# Altium PCB PCB1.pcbdoc (part 1 of 3)
Units mil, origin at the board's own origin, x right, y up, seen from the top; angles counter-clockwise.
Board outline 3735 x 4815 mil, 4 copper layers (Top Layer, Inner1, Inner2, Bottom Layer); 129 components, 135 nets, 714 pads, 315 vias.
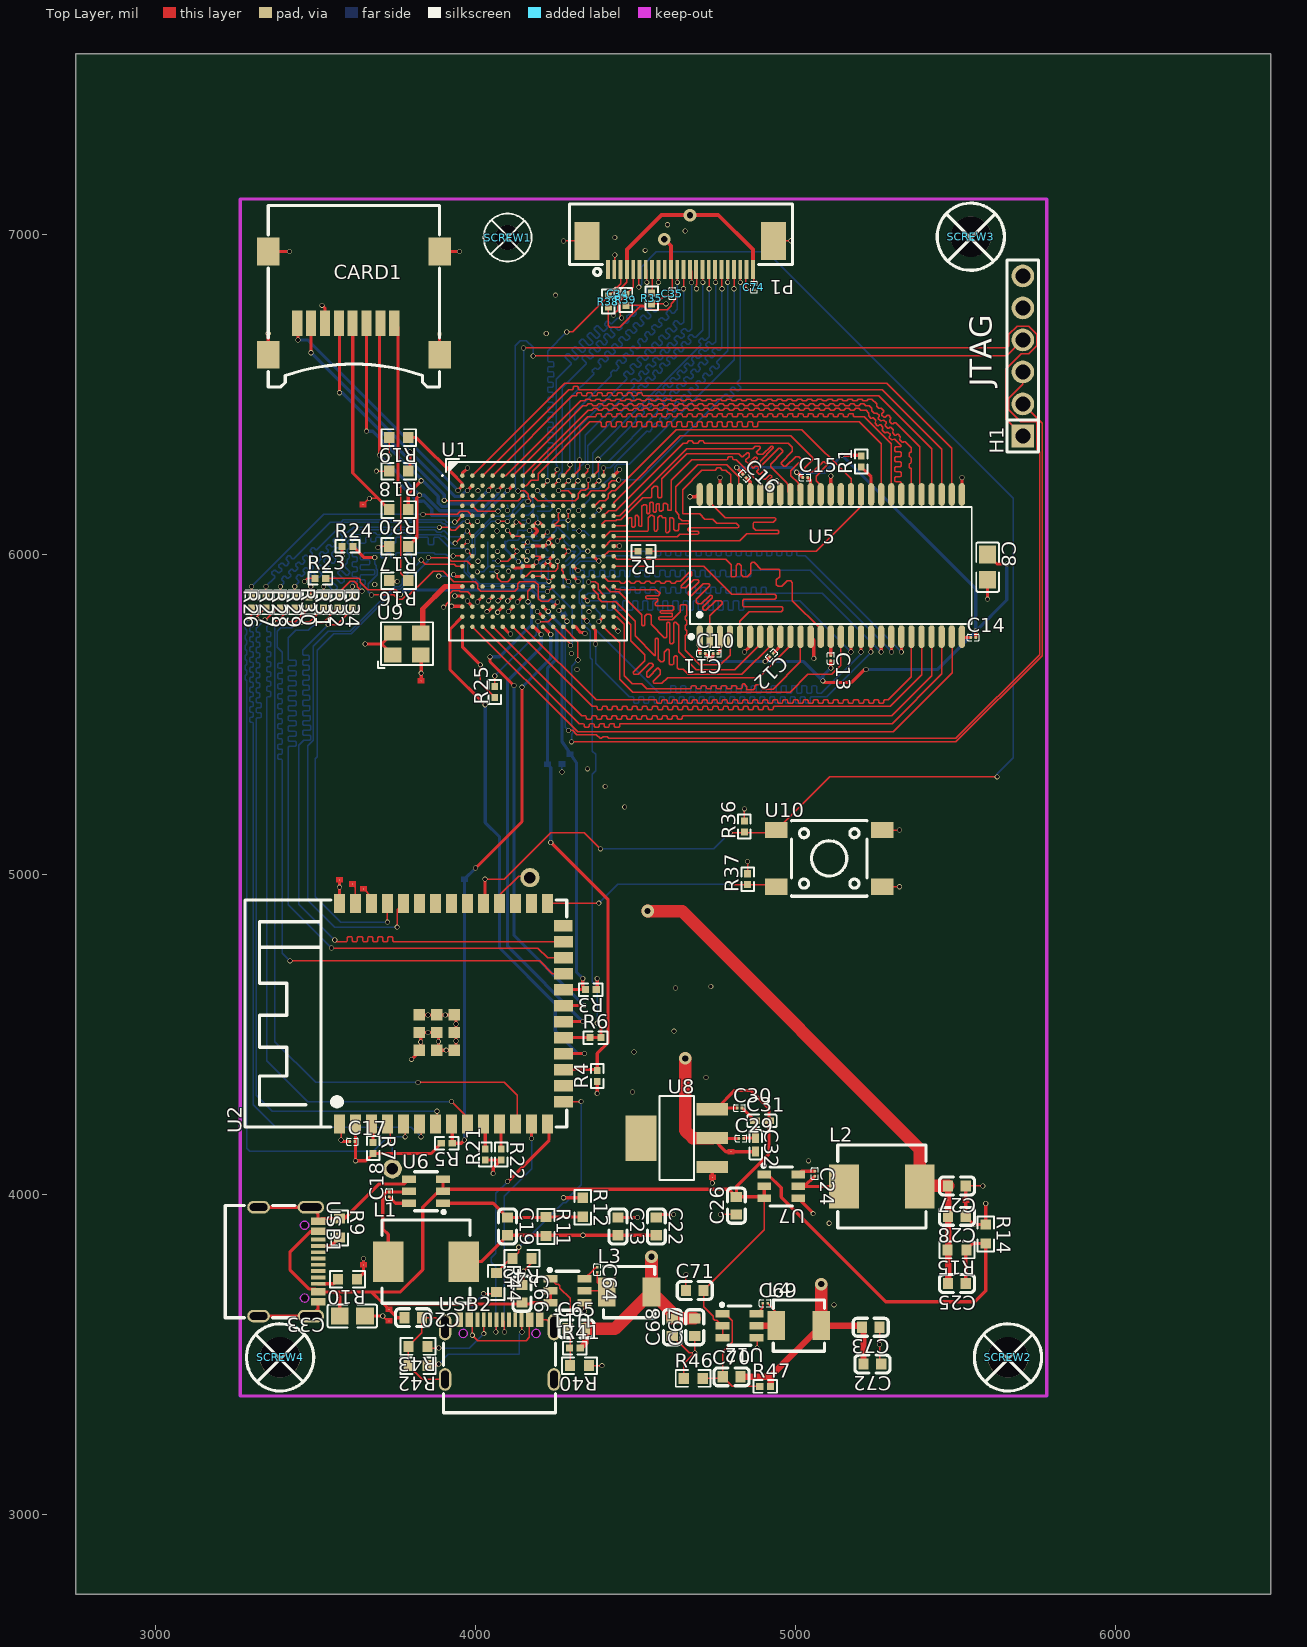
[diagram p0: Top Layer view]
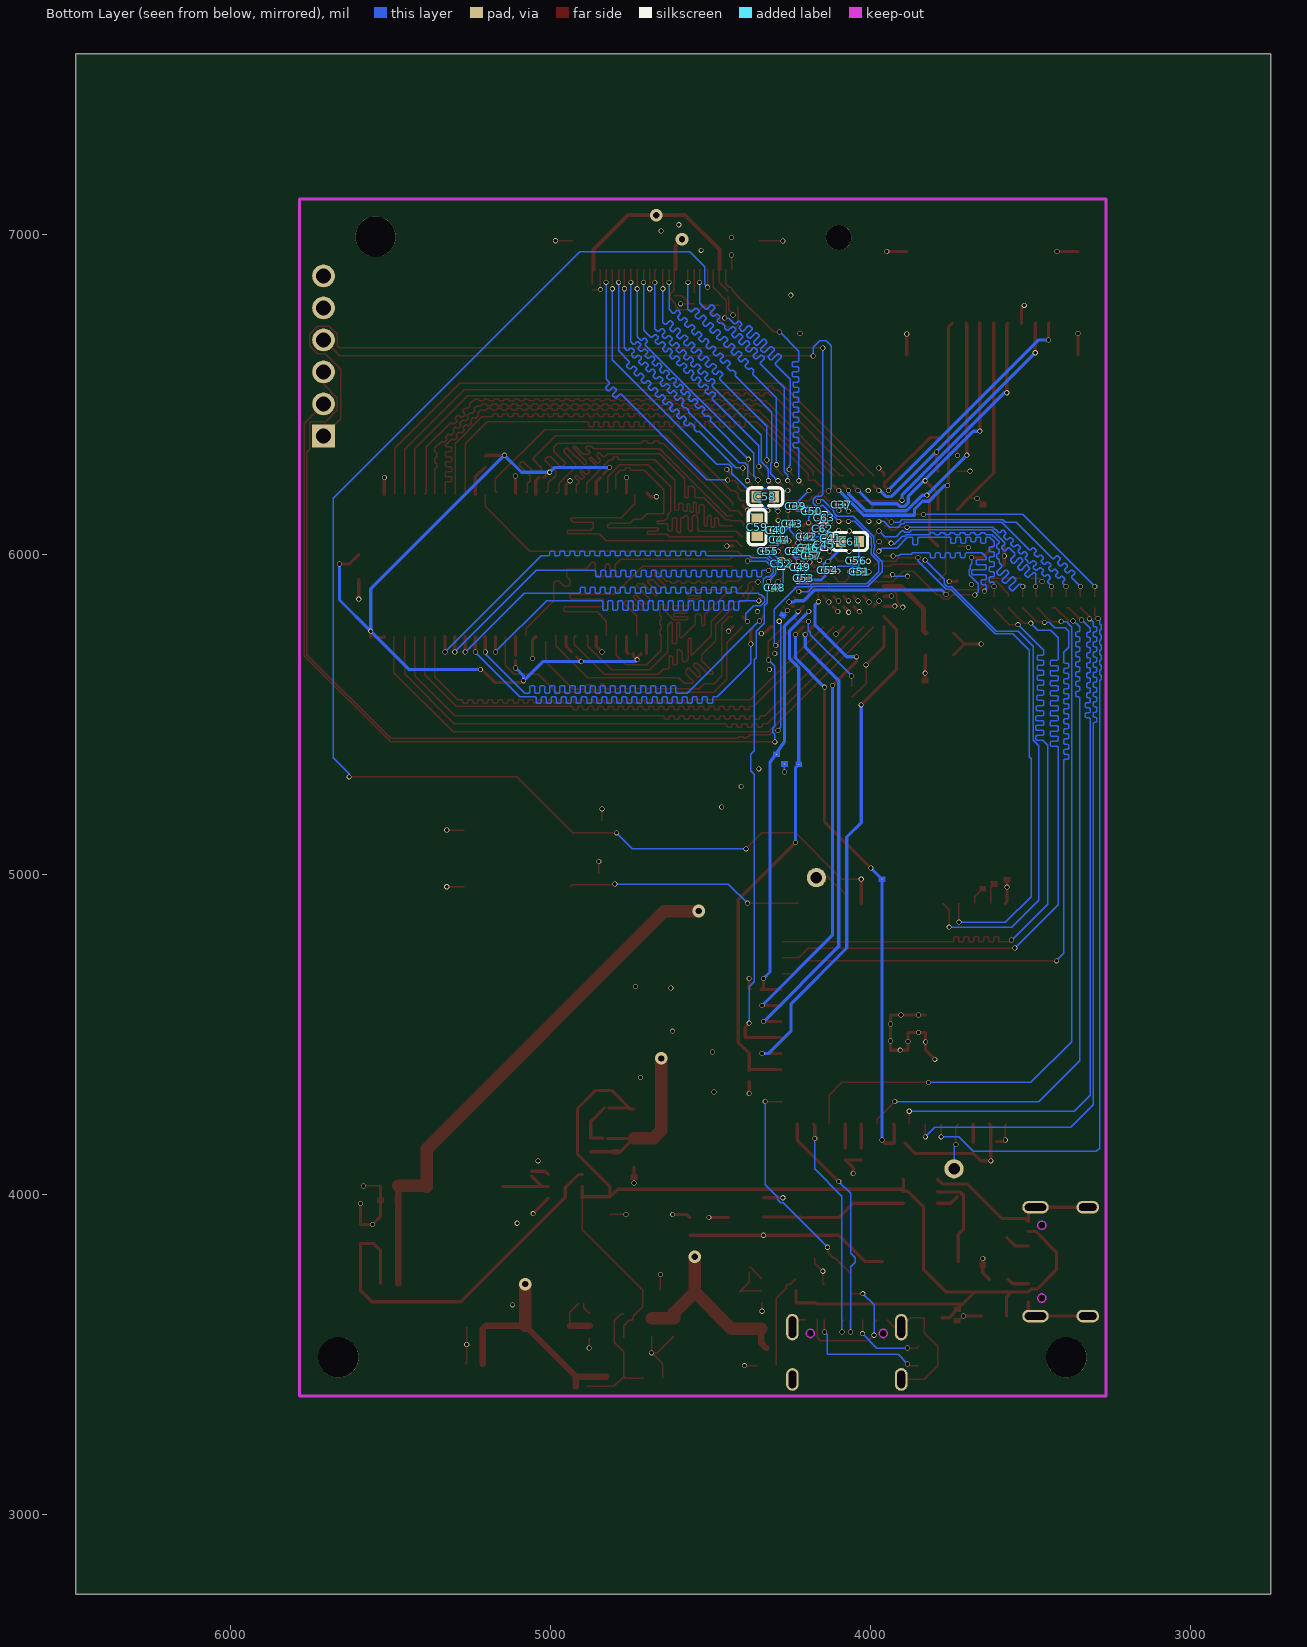
[diagram p1: Bottom Layer view, seen from below]
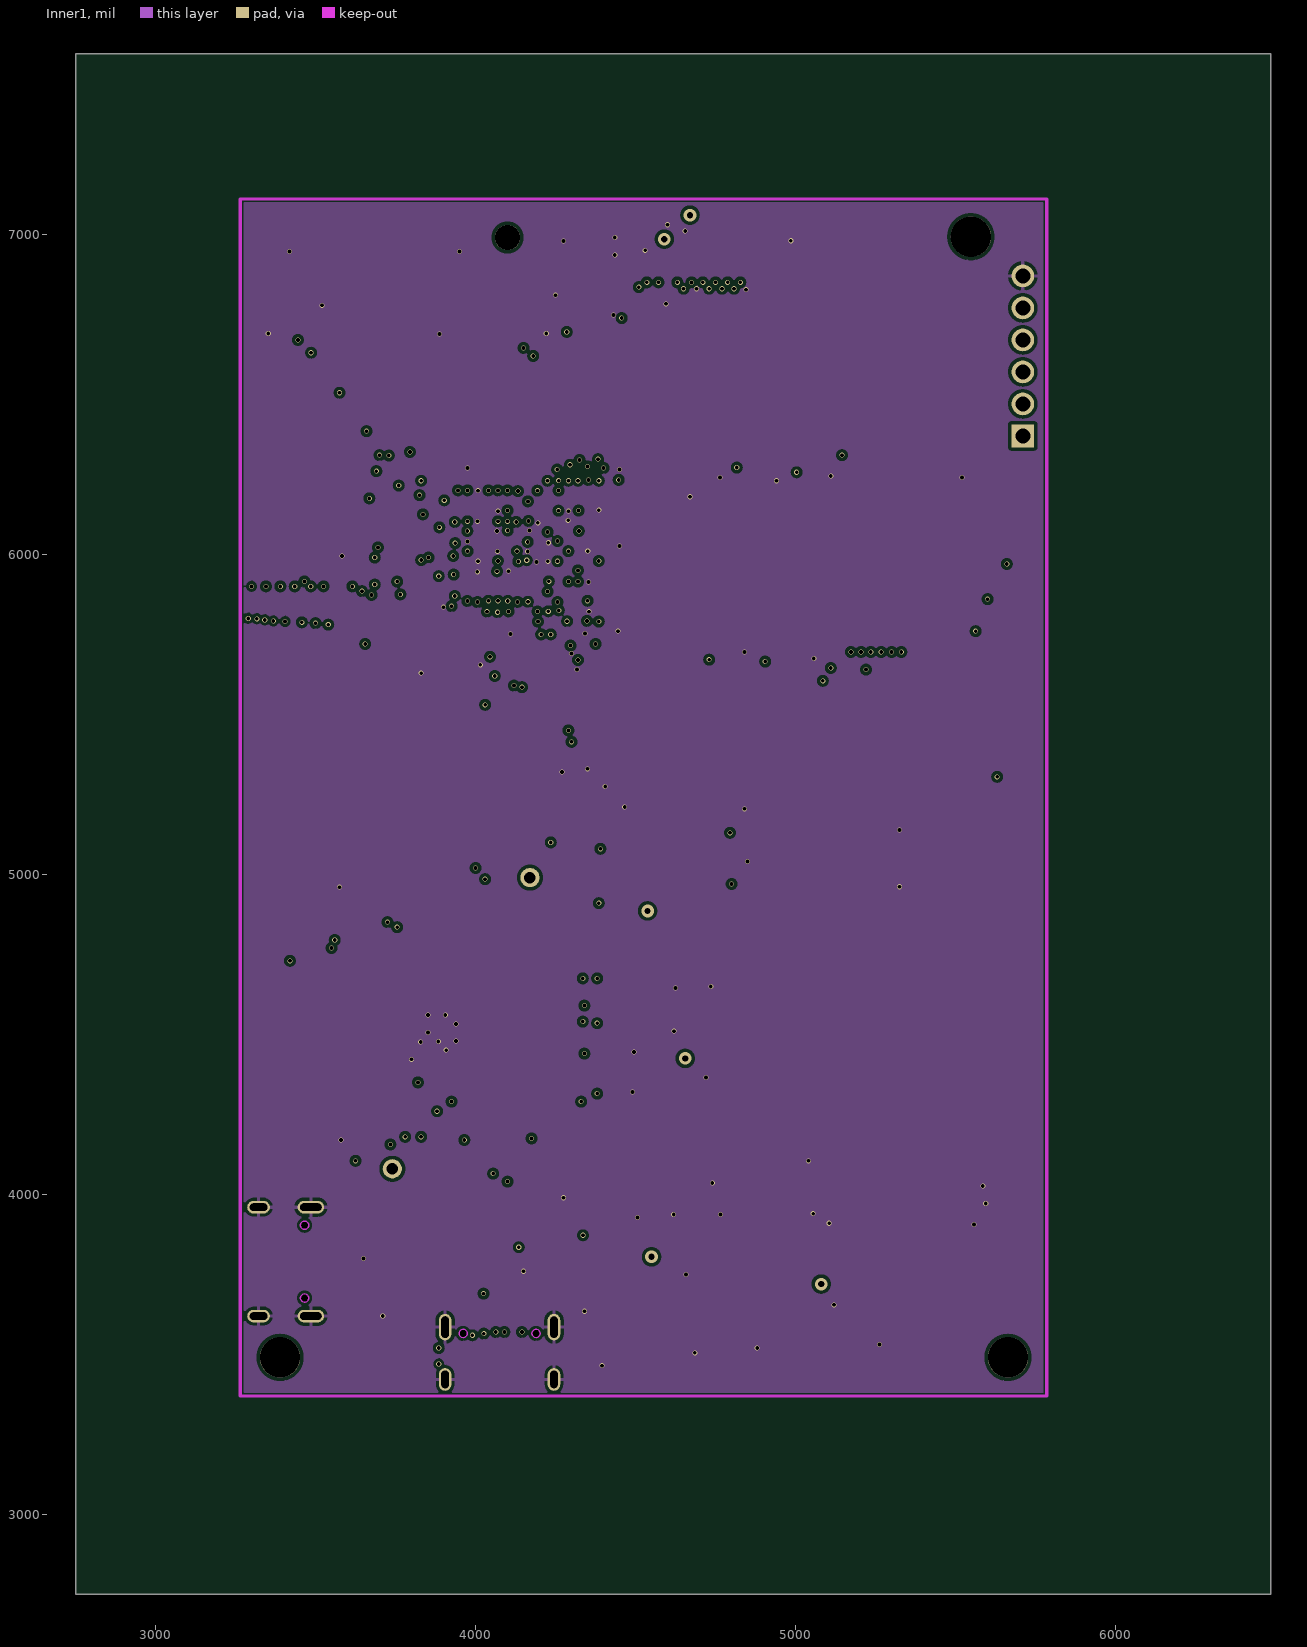
[diagram p2: Inner1]
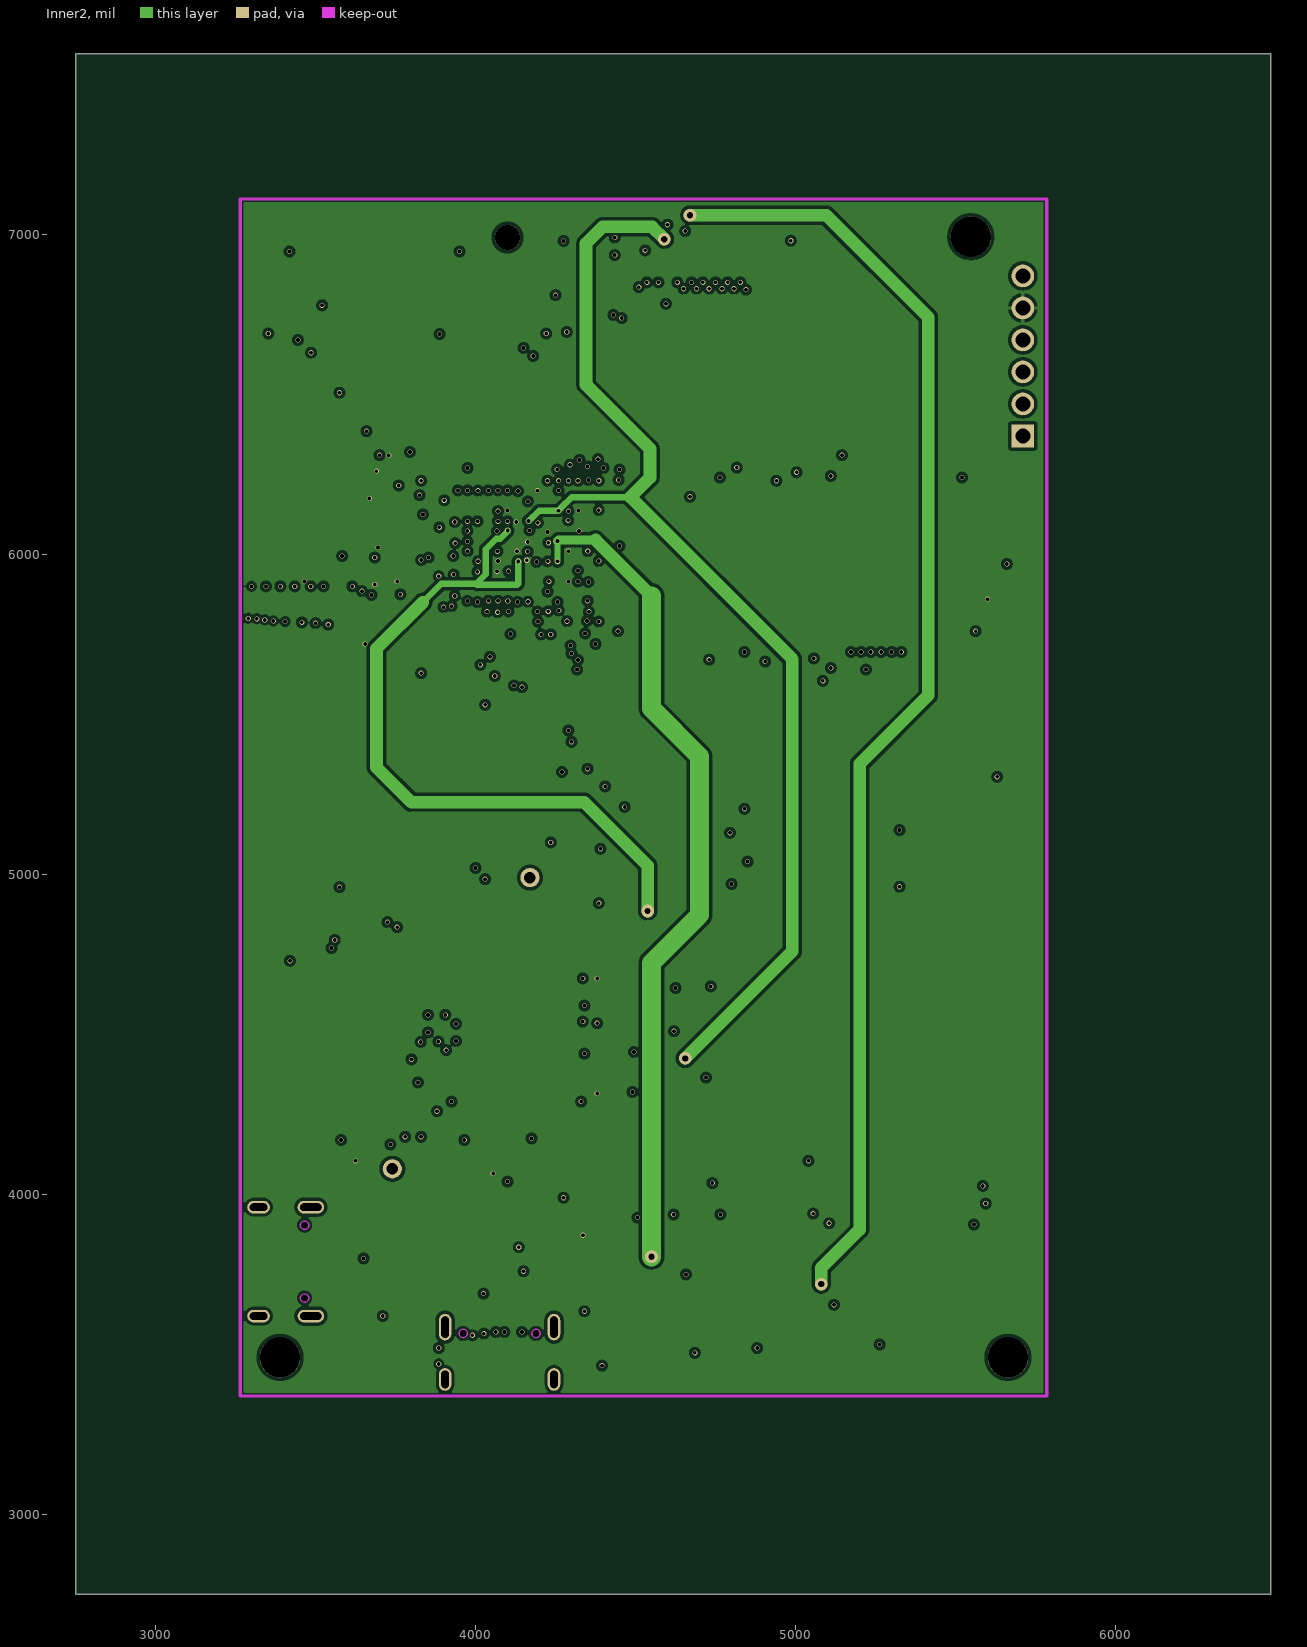
[diagram p3: Inner2]

## Layer stack, top to bottom
Top Solder Mask Layer: solder mask 0.4, Solder Resist, Dk 3.5
Top Layer: signal copper 1.4
Dielectric1: dielectric 12.6, FR-4, Dk 4.8
Inner1: signal copper 1.4
Dielectric2: dielectric 12.6, FR-4, Dk 4.8
Inner2: signal copper 1.4
Dielectric3: dielectric 12.6, FR-4, Dk 4.8
Bottom Layer: signal copper 1.4
Bottom Solder Mask Layer: solder mask 0.4, Solder Resist, Dk 3.5

## Board outline
6485,2750 2750,2750 2750,7565 6485,7565

## Design rules (kind name [scope] priority, off if disabled: settings)
BoardOutlineClearance copperThickness1oz_1 [All] p1: gap=10 ignorepadtopadclearanceinfootprint=FALSE except(0: Arc-SplitContinuation Track-SplitContinuation SMDPad-SplitContinuation THPad-SplitContinuation Via-SplitContinuation Fill-SplitContinuation Poly-SplitContinuation Region-SplitContinuation Text-SplitContinuation; 6: Track-CutoutEdge SMDPad-CutoutEdge THPad-CutoutEdge Via-CutoutEdge Region-CutoutEdge; 11.8: Track-OutlineEdge SMDPad-OutlineEdge THPad-OutlineEdge Via-OutlineEdge Fill-OutlineEdge Fill-CutoutEdge Poly-OutlineEdge Region-OutlineEdge Text-OutlineEdge)
BoardOutlineClearance copperThickness2oz_1 [All] p2: gap=10 ignorepadtopadclearanceinfootprint=FALSE except(0: Arc-SplitContinuation Track-SplitContinuation SMDPad-SplitContinuation THPad-SplitContinuation Via-SplitContinuation Fill-SplitContinuation Poly-SplitContinuation Region-SplitContinuation Text-SplitContinuation; 6: Track-CutoutEdge SMDPad-CutoutEdge THPad-CutoutEdge Via-CutoutEdge Region-CutoutEdge; 11.8: Track-OutlineEdge SMDPad-OutlineEdge THPad-OutlineEdge Via-OutlineEdge Fill-OutlineEdge Fill-CutoutEdge Poly-OutlineEdge Region-OutlineEdge Text-OutlineEdge)
Clearance copperThickness1oz [(InNet('SD_A0') OR InNet('SD_A1') OR InNet('SD_A2') OR InNet('SD_A3') OR InNet('SD_A4') OR InNet('SD_A5') OR InNet('SD_A6') OR InNet('SD_A7') OR InNet('SD_A8') OR InNet('SD_A9') OR InNet('SD_A10') OR InNet('SD_A11') OR InNet('SD_A12') OR InNet('SD_DQ15') OR InNet('SD_DQ14') OR InNet('SD_DQ8') OR InNet('SD_BA0') OR InNet('SD_BA1') OR InNet('SD_DQ9') OR InNet('SD_DQ7') OR InNet('SD_CLK') OR InNet('SD_WE_N') OR InNet('SD_DQ10') OR InNet('SD_CAS_N') OR InNet('SD_DQM1') OR InNet('SD_DQ2') OR InNet('SD_DQ3') OR InNet('SD_DQ11') OR InNet('SD_DQ12') OR InNet('SD_DQ13') OR InNet('SD_DQ0') OR InNet('SD_DQ1') OR InNet('SD_CS_N') OR InNet('SD_RAS_N') OR InNet('SD_DQ4') OR InNet('SD_DQ6') OR InNet('$1N9241') OR InNet('$1N9192') OR InNet('GND') OR InNet('$1N9142') OR InNet('SD_DQ5') OR InNet('$1N9091') OR InNet('SD_DQM0') OR InNet('$1N9039') OR InNet('$1N8986') OR InNet('$1N8318') OR InNet('$1N9437') OR InNet('$1N9341') OR InNet('+3V3') OR InNet('$1N11348') OR InNet('DOUT') OR InNet('DIN') OR InNet('CCLK') OR InNet('DONE') OR InNet('PROGRAMN') OR InNet('INITN') OR InNet('$1N11975') OR InNet('DN') OR InNet('DP') OR InNet('$1N14459') OR InNet('$1N14416') OR InNet('$1N14567') OR InNet('+5V') OR InNet('$1N16833') OR InNet('$1N16832') OR InNet('+1V1') OR InNet('$1N16834') OR InNet('+1V8') OR InNet('$1N17349') OR InNet('$1N12557') OR InNet('$1N12553') OR InNet('M_D2') OR InNet('M_D3') OR InNet('M_CMD') OR InNet('M_CLK') OR InNet('M_D0') OR InNet('M_D1') OR InNet('SDA') OR InNet('SCL') OR InNet('RESET') OR InNet('VSYNC') OR InNet('HREF') OR InNet('Y9') OR InNet('MCLK') OR InNet('Y8') OR InNet('Y7') OR InNet('PCLK') OR InNet('Y6') OR InNet('Y2') OR InNet('Y5') OR InNet('Y3') OR InNet('Y4') OR InNet('CRYSTAL') OR InNet('SSPI_CS_N') OR InNet('D0') OR InNet('D1') OR InNet('D2') OR InNet('D4') OR InNet('D3') OR InNet('D5') OR InNet('D6') OR InNet('D7') OR InNet('RX') OR InNet('TX') OR InNet('$1N29790') OR InNet('$1N29833') OR InNet('$1N29916') OR InNet('$1N29959') OR InNet('$1N30002') OR InNet('$1N30085') OR InNet('$1N30089') OR InNet('$1N30093') OR InNet('TDO') OR InNet('TDI') OR InNet('TMS') OR InNet('TCK') OR InNet('$1N33205') OR InNet('PROGRAM') OR InNet('$2N5507') OR InNet('$2N5509') OR InNet('$2N5511') OR InNet('FSDA') OR InNet('FSCL') OR InNet('+2V5') OR InNet('$1N60668') OR InNet('$1N60669') OR InNet('$1N60670') OR InNet('USB_VBUS') OR InNet('$1N63772') OR InNet('$1N63749') OR InNet('$1N63825') OR InNet('+2V8') OR InNet('$1N64402') OR InNet('$1N64401') OR InNet('$1N64403'))] p1: gap=6 ignorepadtopadclearanceinfootprint=FALSE except(3.9: Track-Track; 6.9: Track-Hole SMDPad-Hole THPad-Hole Via-Hole Fill-Hole Poly-Hole Region-Hole Text-Hole; 7: Arc-Arc Arc-Track Arc-SMDPad Arc-THPad Arc-Via Arc-Fill Arc-Poly Arc-Region Arc-Text Arc-Hole; 11.8: Track-Fill Fill-Region)
Clearance copperThickness2oz [All] p2: gap=6 ignorepadtopadclearanceinfootprint=FALSE except(6.9: Track-Hole SMDPad-Hole THPad-Hole Via-Hole Fill-Hole Poly-Hole Region-Hole Text-Hole; 7: Arc-Arc Arc-Track Arc-SMDPad Arc-THPad Arc-Via Arc-Fill Arc-Poly Arc-Region Arc-Text Arc-Hole; 8: Track-Track; 11.8: Track-Fill Fill-Region)
DiffPairsRouting differentialPair [All] p1: maxlimit=6 minlimit=6 mostfreqgap=6 toplayer_minwidth=5 toplayer_maxwidth=100 toplayer_prefwidth=10 midlayer1_minwidth=5 midlayer1_maxwidth=100 midlayer1_prefwidth=10 midlayer2_minwidth=5 midlayer2_maxwidth=100 midlayer2_prefwidth=10 bottomlayer_minwidth=5 bottomlayer_maxwidth=100 bottomlayer_prefwidth=10 maxuncoupledlength=10
PasteMaskExpansion pasteMaskExpansion [All] p1: expansion=0
PlaneConnect innerPlane [All] p1: planeconnectstyle=Relief reliefexpansion=20 reliefentries=4 reliefconductorwidth=10 reliefairgap=10
PolygonConnect copperRegion [All] p1: connectstyle=Relief reliefconductorwidth=10 reliefentries=4 polygonreliefangle="90 Angle" airgapwidth=10
RoutingVias viaSize [All] p1: holewidth=11.81 width=15.75 viastyle="Through Hole" minholewidth=11.81 minwidth=15.75 maxholewidth=248.03 maxwidth=393.7
SolderMaskExpansion solderMaskExpansion [All] p1: expansion=2 istentingtop=FALSE useseparateexpansions=TRUE expansionbottom=2 istentingbottom=FALSE
Width copperThickness1oz_2 [All] p1: maxlimit=100 minlimit=4 preferedwidth=4
Width copperThickness2oz_2 [All] p2: maxlimit=100 minlimit=8 preferedwidth=10
27 further rules are at their usual default settings.

## Components (designator, comment, footprint, x,y, rotation, side; value= is the part's Value field where it differs from the comment)
C8 "CL21A476MQYNNNE" C0805 5600,5960 r270 top
C10 "GRM022R60J104KE15D" C01005 4710,5690 r0 top
C11 "GRM022R60J104KE15D" C01005 4750,5690 r180 top
C12 "GRM022R60J104KE15D" C01005 4925,5685 r225 top
C13 "GRM022R60J104KE15D" C01005 5110,5675 r270 top
C14 "GRM022R60J104KE15D" C01005 5555,5740 r0 top
C15 "GRM022R60J104KE15D" C01005 5030,6240 r0 top
C16 "GRM022R60J104KE15D" C01005 4840,6245 r315 top
C17 "GRM022R60J104KE15D" C01005 3615,4165 r0 top
C18 "GRM022R60J104KE15D" C01005 3730,4000 r90 top
C19 "TCC0603X7R104K500CT" C0603 4100,3900 r270 top
C20 "TCC0603X5R226M6R3CT" C0603 3805,3615 r180 top
C22 "TCC0603X5R226M6R3CT" C0603 4565,3900 r270 top
C23 "TCC0603X5R226M6R3CT" C0603 4445,3900 r270 top
C24 "GRM022R60J104KE15D" C01005 5060,4065 r270 top
C25 "TCC0603X7R104K500CT" C0603 5504.18,3721.54 r180 top
C26 "TCC0603X5R226M6R3CT" C0603 4815,3965 r90 top
C27 "TCC0603X5R226M6R3CT" C0603 5504.18,4026.54 r180 top
C28 "TCC0603X5R226M6R3CT" C0603 5504.18,3931.54 r180 top
C29 "GRM022R60J104KE15D" C01005 4830,4175 r0 top
C30 "GRM022R60J104KE15D" C01005 4825,4270 r0 top
C31 "GRM155R60J106ME44D" C0402 4895,4230 r0 top
C32 "GRM155R60J106ME44D" C0402 4875,4155 r270 top
C33 "CL21A476MQYNNNE" C0805 3615,3620 r180 top
C34 "GRM022R60J104KE15D" C01005 4445,6815 r270 top
C35 "GRM022R60J104KE15D" C01005 4615,6815 r270 top
C37 "GRM022R60J104KE15D" C01005 4090,6155 r180 bottom
C39 "GRM022R60J104KE15D" C01005 4235,6150 r180 bottom
C40 "GRM022R60J104KE15D" C01005 4295,6075 r180 bottom
C41 "GRM022R60J104KE15D" C01005 4125,6050 r90 bottom
C42 "GRM022R60J104KE15D" C01005 4200,6055 r180 bottom
C43 "GRM022R60J104KE15D" C01005 4245,6095 r180 bottom
C44 "GRM022R60J104KE15D" C01005 4285,6045 r180 bottom
C45 "GRM022R60J104KE15D" C01005 4145,6030 r270 bottom
C46 "GRM022R60J104KE15D" C01005 4195,6020 r180 bottom
C47 "GRM022R60J104KE15D" C01005 4235,6010 r0 bottom
C48 "GRM022R60J104KE15D" C01005 4300,5895 r180 bottom
C49 "GRM022R60J104KE15D" C01005 4220,5960 r180 bottom
C50 "GRM022R60J104KE15D" C01005 4185,6135 r180 bottom
C51 "GRM022R60J104KE15D" C01005 4035,5945 r180 bottom
C52 "GRM022R60J104KE15D" C01005 4280,5970 r270 bottom
C53 "GRM022R60J104KE15D" C01005 4210,5925 r180 bottom
C54 "GRM022R60J104KE15D" C01005 4135,5950 r180 bottom
C55 "GRM022R60J104KE15D" C01005 4320,6010 r0 bottom
C56 "GRM022R60J104KE15D" C01005 4045,5980 r180 bottom
C57 "GRM022R60J104KE15D" C01005 4185,5995 r0 bottom
C58 "TCC0603X5R226M6R3CT" C0603 4330,6180 r180 bottom
C59 "TCC0603X5R226M6R3CT" C0603 4355,6085 r90 bottom
C61 "TCC0603X5R226M6R3CT" C0603 4065,6040 r180 bottom
C62 "GRM022R60J104KE15D" C01005 4150,6080 r270 bottom
C63 "GRM022R60J104KE15D" C01005 4145,6115 r90 bottom
C64 "GRM022R60J104KE15D" C01005 4380,3765 r270 top
C65 "TCC0603X7R104K500CT" C0603 4315,3580 r0 top
C66 "TCC0603X5R226M6R3CT" C0603 4145,3690 r270 top
C67 "TCC0603X5R226M6R3CT" C0603 4685,3585 r90 top
C68 "TCC0603X5R226M6R3CT" C0603 4615,3585 r90 top
C69 "GRM022R60J104KE15D" C01005 4905,3660 r0 top
C70 "TCC0603X7R104K500CT" C0603 4800,3430 r0 top
C71 "TCC0603X5R226M6R3CT" C0603 4685,3700 r0 top
C72 "TCC0603X5R226M6R3CT" C0603 5240,3470 r180 top
C73 "TCC0603X5R226M6R3CT" C0603 5235,3585 r180 top
C74 "GRM022R60J104KE15D" C01005 4870,6835 r270 top
CARD1 "DS1139-06-08SS4BSR" TF-SMD_DS1139-06-08SS4BSR 3620,6785 r0 top
H1 "2.54-1x6P直针" HDR-TH_6P-P2.54-V-M-1 5710,6620 r90 top
L1 "FXL0630-6R8-M" IND-SMD_L7.0-W6.6 3845,3790 r0 top
L2 "FXL0630-100-M" IND-SMD_L7.3-W6.8 5269.36,4024.78 r0 top
L3 "SL0420-3R3M" IND-SMD_L4.5-W4.1_SL0420 4480,3695 r0 top
L4 "SL0420-3R3M" IND-SMD_L4.5-W4.1_SL0420 5010,3590 r0 top
P1 "AFC07-S24FCC-00" FPC-SMD_AFC07-S24FCC-00 4640,6935 r180 top
R1 "0402WGF1002TCE" R0402 5205,6290 r90 top
R2 "0402WGF330JTCE" R0402 4525,6010 r180 top
R3 "0402WGF1002TCE" R0402 4360,4640 r180 top
R4 "0402WGF1002TCE" R0402 4380,4370 r90 top
R5 "0402WGF1002TCE" R0402 3910,4160 r180 top
R6 "0402WGF330JTCE" R0402 4375,4490 r0 top
R7 "0402WGF1002TCE" R0402 3680,4145 r270 top
R9 "0603WAF5101T5E" R0603 3575,3895 r270 top
R10 "0603WAF5101T5E" R0603 3600,3735 r180 top
R11 "FRC0603F1963TS" R0603 4220,3900 r270 top
R12 "FRC0603F6202TS" R0603 4335,3960 r270 top
R14 "FRC0603F6202TS" R0603 5594.18,3876.54 r270 top
R15 "0603WAF2322T5E" R0603 5504.18,3826.54 r180 top
R16 "FRC0603F6202TS" R0603 3759.84,5917.97 r180 top
R17 "FRC0603F6202TS" R0603 3760,6025 r180 top
R18 "FRC0603F6202TS" R0603 3760,6260 r180 top
R19 "FRC0603F6202TS" R0603 3760,6365 r180 top
R20 "FRC0603F6202TS" R0603 3760,6140 r180 top
R21 "0402WGF1002TCE" R0402 4030,4125 r270 top
R22 "0402WGF1002TCE" R0402 4080,4125 r270 top
R23 "0402WGF1002TCE" R0402 3515,5925 r0 top
R24 "0402WGF1002TCE" R0402 3600,6025 r0 top
R25 "0402WGF1002TCE" R0402 4060,5570 r90 top
R26 "0402WGF330JTCE" R0402 3300,5850 r270 top
R27 "0402WGF330JTCE" R0402 3345,5850 r270 top
R28 "0402WGF330JTCE" R0402 3390,5850 r270 top
R29 "0402WGF330JTCE" R0402 3435,5850 r270 top
R30 "0402WGF330JTCE" R0402 3480,5850 r270 top
R31 "0402WGF330JTCE" R0402 3525,5850 r270 top
R32 "0402WGF330JTCE" R0402 3570,5850 r270 top
R34 "0402WGF330JTCE" R0402 3615,5850 r270 top
R35 "0402WGF1002TCE" R0402 4550,6800 r270 top
R36 "0402WGF1002TCE" R0402 4840,5150 r90 top
R37 "0402WGF1002TCE" R0402 4850,4985 r90 top
R38 "0402WGF1002TCE" R0402 4415,6790 r270 top
R39 "0402WGF1002TCE" R0402 4470,6795 r270 top
R40 "FRC0603F6202TS" R0603 4325,3465 r180 top
R41 "RC0402FR-07130KL" R0402 4310,3520 r0 top
R42 "0603WAF5101T5E" R0603 3820,3465 r180 top
R43 "0603WAF5101T5E" R0603 3820,3525 r180 top
R44 "FRC0603F1963TS" R0603 4065,3725 r270 top
R45 "FRC0603F1963TS" R0603 4145,3800 r180 top
R46 "FRC0603F6202TS" R0603 4680,3425 r0 top
R47 "0402WGF1543TCE" R0402 4905,3400 r0 top
SCREW1 "Screw-Hole-M2" Screw-Hole-M2 4100,6990 r0 top
SCREW2 "Screw-Hole-M3" Screw-Hole-M3 5666.08,3488.34 r0 top
SCREW3 "Screw-Hole-M3" Screw-Hole-M3 5550,6990 r0 top
SCREW4 "Screw-Hole-M3" Screw-Hole-M3 3391.65,3488.34 r0 top
U1 "LFE5U-25F-6BG256C" CABGA-256_L14.0-W14.0-R16-C16-P0.80-TL 4195,6010 r0 top
U2 "ESP32-S3-WROOM-1-N16R2" WIRELM-SMD_ESP32-S3-WROOM-1 3925,4565 r90 top
U5 "W9825G6KH-6" TSOP-54_L22.2-W10.2-P0.80-LS11.8-BL 5110,5965 r0 top
U6 "AP63200WU-7" SOT-23-6_L2.9-W1.6-P0.95-LS2.8-BR 3845,4010 r0 top
U7 "AP63200WU-7" SOT-23-6_L2.9-W1.6-P0.95-LS2.8-BR 4955,4025 r180 top
U8 "AMS1117-1.8_C6185" SOT-223-4_L6.5-W3.5-P2.30-LS7.0-BR 4628.14,4176.14 r0 top
U9 "XOS32024000LT00351005" OSC-SMD_4P-L3.2-W2.5-BL 3785,5720 r0 top
U10 "TPS645-5NC60" SW-SMD_4P-L6.0-W6.0-P4.50-LS9.2 5105,5050 r0 top
U11 "AP63200WU-7" SOT-23-6_L2.9-W1.6-P0.95-LS2.8-BR 4287.09,3698.9 r180 top
U12 "AP63200WU-7" SOT-23-6_L2.9-W1.6-P0.95-LS2.8-BR 4825,3590 r180 top
USB1 "TYPE-C16PIN" USB-C-SMD_TYPE-C16PIN 3415,3790 r270 top
USB2 "TYPE-C16PIN" USB-C-SMD_TYPE-C16PIN 4075,3515 r0 top

## Footprints (in the part's own frame and the unit in brackets; to place one, negate y for a bottom-side part, rotate by r counter-clockwise, add the part's x,y. Pads: shape width x height; smd on the part's side, far side on the other; paste and mask are expansions set on the pad)
C0402 [mm]
  rect 0.79x0.54 smd paste-100 mask+0.051: 1(-0.545,0) 2(0.545,0)
  silkscreen extent -1.17,-0.5 1.17,0.5
C0603 [mm]
  rect 0.8x0.9 smd: 1(-0.7,0) 2(0.7,0)
  silkscreen extent -1.39,-0.71 1.39,0.71
C0805 [mm]
  rect 1.41x1.35 smd paste-100 mask+0.051: 1(-1,0) 2(1,0)
  silkscreen extent -1.96,-0.9 1.96,0.9
C01005 [mm]
  rect 0.21x0.22 smd: 1(-0.195,0) 2(0.195,0)
  silkscreen extent -0.46,-0.27 0.46,0.27
CABGA-256_L14.0-W14.0-R16-C16-P0.80-TL [mm]
  round 0.36 smd paste-100 mask+0.051: A1(-6,6) A2(-5.2,6) A3(-4.4,6) A4(-3.6,6) A5(-2.8,6) A6(-2,6) A7(-1.2,6) A8(-0.4,6) A9(0.4,6) A10(1.2,6) A11(2,6) A12(2.8,6) A13(3.6,6) A14(4.4,6) A15(5.2,6) A16(6,6) B1(-6,5.2) B2(-5.2,5.2) B3(-4.4,5.2) B4(-3.6,5.2) B5(-2.8,5.2) B6(-2,5.2) B7(-1.2,5.2) B8(-0.4,5.2) B9(0.4,5.2) B10(1.2,5.2) B11(2,5.2) B12(2.8,5.2) B13(3.6,5.2) B14(4.4,5.2) B15(5.2,5.2) B16(6,5.2) C1(-6,4.4) C2(-5.2,4.4) C3(-4.4,4.4) C4(-3.6,4.4) C5(-2.8,4.4) C6(-2,4.4) C7(-1.2,4.4) C8(-0.4,4.4) C9(0.4,4.4) C10(1.2,4.4) C11(2,4.4) C12(2.8,4.4) C13(3.6,4.4) C14(4.4,4.4) C15(5.2,4.4) C16(6,4.4) D1(-6,3.6) D2(-5.2,3.6) D3(-4.4,3.6) D4(-3.6,3.6) D5(-2.8,3.6) D6(-2,3.6) D7(-1.2,3.6) D8(-0.4,3.6) D9(0.4,3.6) D10(1.2,3.6) D11(2,3.6) D12(2.8,3.6) D13(3.6,3.6) D14(4.4,3.6) D15(5.2,3.6) D16(6,3.6) E1(-6,2.8) E2(-5.2,2.8) E3(-4.4,2.8) E4(-3.6,2.8) E5(-2.8,2.8) E6(-2,2.8) E7(-1.2,2.8) E8(-0.4,2.8) E9(0.4,2.8) E10(1.2,2.8) E11(2,2.8) E12(2.8,2.8) E13(3.6,2.8) E14(4.4,2.8) E15(5.2,2.8) E16(6,2.8) F1(-6,2) F2(-5.2,2) F3(-4.4,2) F4(-3.6,2) F5(-2.8,2) F6(-2,2) F7(-1.2,2) F8(-0.4,2) F9(0.4,2) F10(1.2,2) F11(2,2) F12(2.8,2) F13(3.6,2) F14(4.4,2) F15(5.2,2) F16(6,2) G1(-6,1.2) G2(-5.2,1.2) G3(-4.4,1.2) G4(-3.6,1.2) G5(-2.8,1.2) G6(-2,1.2) G7(-1.2,1.2) G8(-0.4,1.2) G9(0.4,1.2) G10(1.2,1.2) G11(2,1.2) G12(2.8,1.2) G13(3.6,1.2) G14(4.4,1.2) G15(5.2,1.2) G16(6,1.2) H1(-6,0.4) H2(-5.2,0.4) H3(-4.4,0.4) H4(-3.6,0.4) H5(-2.8,0.4) H6(-2,0.4) H7(-1.2,0.4) H8(-0.4,0.4) H9(0.4,0.4) H10(1.2,0.4) H11(2,0.4) H12(2.8,0.4) H13(3.6,0.4) H14(4.4,0.4) H15(5.2,0.4) H16(6,0.4) J1(-6,-0.4) J2(-5.2,-0.4) J3(-4.4,-0.4) J4(-3.6,-0.4) J5(-2.8,-0.4) J6(-2,-0.4) J7(-1.2,-0.4) J8(-0.4,-0.4) J9(0.4,-0.4) J10(1.2,-0.4) J11(2,-0.4) J12(2.8,-0.4) J13(3.6,-0.4) J14(4.4,-0.4) J15(5.2,-0.4) J16(6,-0.4) K1(-6,-1.2) K2(-5.2,-1.2) K3(-4.4,-1.2) K4(-3.6,-1.2) K5(-2.8,-1.2) K6(-2,-1.2) K7(-1.2,-1.2) K8(-0.4,-1.2) K9(0.4,-1.2) K10(1.2,-1.2) K11(2,-1.2) K12(2.8,-1.2) K13(3.6,-1.2) K14(4.4,-1.2) K15(5.2,-1.2) K16(6,-1.2) L1(-6,-2) L2(-5.2,-2) L3(-4.4,-2) L4(-3.6,-2) L5(-2.8,-2) L6(-2,-2) L7(-1.2,-2) L8(-0.4,-2) L9(0.4,-2) L10(1.2,-2) L11(2,-2) L12(2.8,-2) L13(3.6,-2) L14(4.4,-2) L15(5.2,-2) L16(6,-2) M1(-6,-2.8) M2(-5.2,-2.8) M3(-4.4,-2.8) M4(-3.6,-2.8) M5(-2.8,-2.8) M6(-2,-2.8) M7(-1.2,-2.8) M8(-0.4,-2.8) M9(0.4,-2.8) M10(1.2,-2.8) M11(2,-2.8) M12(2.8,-2.8) M13(3.6,-2.8) M14(4.4,-2.8) M15(5.2,-2.8) M16(6,-2.8) N1(-6,-3.6) N2(-5.2,-3.6) N3(-4.4,-3.6) N4(-3.6,-3.6) N5(-2.8,-3.6) N6(-2,-3.6) N7(-1.2,-3.6) N8(-0.4,-3.6) N9(0.4,-3.6) N10(1.2,-3.6) N11(2,-3.6) N12(2.8,-3.6) N13(3.6,-3.6) N14(4.4,-3.6) N15(5.2,-3.6) N16(6,-3.6) P1(-6,-4.4) P2(-5.2,-4.4) P3(-4.4,-4.4) P4(-3.6,-4.4) P5(-2.8,-4.4) P6(-2,-4.4) P7(-1.2,-4.4) P8(-0.4,-4.4) P9(0.4,-4.4) P10(1.2,-4.4) P11(2,-4.4) P12(2.8,-4.4) P13(3.6,-4.4) P14(4.4,-4.4) P15(5.2,-4.4) P16(6,-4.4) R1(-6,-5.2) R2(-5.2,-5.2) R3(-4.4,-5.2) R4(-3.6,-5.2) R5(-2.8,-5.2) R6(-2,-5.2) R7(-1.2,-5.2) R8(-0.4,-5.2) R9(0.4,-5.2) R10(1.2,-5.2) R11(2,-5.2) R12(2.8,-5.2) R13(3.6,-5.2) R14(4.4,-5.2) R15(5.2,-5.2) R16(6,-5.2) T1(-6,-6) T2(-5.2,-6) T3(-4.4,-6) T4(-3.6,-6) T5(-2.8,-6) T6(-2,-6) T7(-1.2,-6) T8(-0.4,-6) T9(0.4,-6) T10(1.2,-6) T11(2,-6) T12(2.8,-6) T13(3.6,-6) T14(4.4,-6) T15(5.2,-6) T16(6,-6)
  silkscreen extent -7.63,-7.08 7.08,7.3
FPC-SMD_AFC07-S24FCC-00 [mm]
  rect 0.3x1.5 smd: 1(5.745,1.129) 2(5.245,1.129) 3(4.746,1.129) 4(4.245,1.129) 5(3.746,1.129) 6(3.245,1.129) 7(2.746,1.129) 8(2.245,1.129) 9(1.746,1.129) 10(1.245,1.129) 11(0.746,1.129) 12(0.245,1.129) 13(-0.254,1.129) 14(-0.755,1.129) 15(-1.251,1.13) 16(-1.754,1.13) 17(-2.254,1.128) 18(-2.754,1.129) 19(-3.254,1.129) 20(-3.756,1.132) 21(-4.256,1.132) 22(-4.756,1.132) 23(-5.256,1.132) 24(-5.756,1.132)
  rect 2x3 smd: 25(-7.401,-1.132) 26(7.401,-1.125)
  silkscreen extent -8.89,-4.07 8.8,1.61
HDR-TH_6P-P2.54-V-M-1 [mm]
  rect 1.8x1.8 hole 1.2: 1(-6.35,0)
  round 1.8 hole 1.2: 2(-3.81,0) 3(-1.27,0) 4(1.27,0) 5(3.81,0) 6(6.35,0)
  silkscreen extent -7.62,-1.25 7.62,1.25
IND-SMD_L4.5-W4.1_SL0420 [mm]
  rect 1.4x2.3 smd paste+0 mask+0.05: 1(-1.775,0) 2(1.775,0)
  silkscreen extent -2.03,-2.03 2.03,2.03
IND-SMD_L7.0-W6.6 [mm]
  rect 2.4x3.2 smd: 1(-3,0) 2(3,0)
  silkscreen extent -3.5,-3.3 3.5,3.3
IND-SMD_L7.3-W6.8 [mm]
  rect 2.35x3.5 smd: 1(-3,0) 2(3,0)
  silkscreen extent -3.5,-3.3 3.5,3.3
OSC-SMD_4P-L3.2-W2.5-BL [mm]
  rect 1.4x1.2 smd: 1(-1.1,-0.875) 2(1.1,-0.875) 3(1.1,0.875) 4(-1.1,0.875)
  silkscreen extent -2.29,-1.9 2.07,1.72
R0402 [mm]
  rect 0.566x0.54 smd paste-100 mask+0.051: 1(-0.433,0) 2(0.433,0)
  silkscreen extent -0.94,-0.5 0.94,0.5
R0603 [mil]
  rect 31.75x34.02 smd paste-3937.01 mask+2: 1(-29.66,0) 2(29.66,0)
  silkscreen extent -55,-26 55,26
Screw-Hole-M2 [mm]
  round 2 hole 2: 1(0,0)
  silkscreen extent -1.9,-1.9 1.9,1.9
Screw-Hole-M3 [mil]
  round 126 hole 126 paste-99999 mask+4: 1(-2.5,2.5)
  silkscreen extent -107,-102 102,107
SOT-23-6_L2.9-W1.6-P0.95-LS2.8-BR [mm]
  rect 1.1x0.6 smd paste+0 mask+0.051: 1(1.35,-0.95) 2(1.35,0) 3(1.35,0.95) 4(-1.35,0.95) 5(-1.35,0) 6(-1.35,-0.95)
  silkscreen extent -0.9,-1.78 1.52,1.55
SOT-223-4_L6.5-W3.5-P2.30-LS7.0-BR [mm]
  rect 2.47x0.98 smd: 1(2.835,-2.3) 2(2.835,0) 3(2.835,2.3)
  rect 2.47x3.6 smd: 4(-2.835,0)
  silkscreen extent -1.37,-3.33 1.37,3.33
SW-SMD_4P-L6.0-W6.0-P4.50-LS9.2 [mm]
  rect 1.8x1.3 smd: 1(-4.2,2.25) 2(4.2,2.25) 3(-4.2,-2.25) 4(4.2,-2.25)
  silkscreen extent -3,-3 3,3
TF-SMD_DS1139-06-08SS4BSR [mm]
  rect 0.8x2 smd: 1(3.2,-1.6) 2(2.1,-1.6) 3(1,-1.6) 4(-0.1,-1.6) 5(-1.2,-1.6) 6(-2.3,-1.6) 7(-3.4,-1.6) 8(-4.5,-1.6)
  rect 1.8x2.2 smd: 9(-6.8,4.1) 10(-6.8,-4.1) 11(6.8,-4.1) 12(6.8,4.1)
  silkscreen extent -6.8,-6.65 6.8,7.75
TSOP-54_L22.2-W10.2-P0.80-LS11.8-BL [mm]
  oval 0.5x1.8 smd: 1(-10.4,-5.642) 2(-9.6,-5.642) 3(-8.8,-5.642) 4(-8,-5.642) 5(-7.2,-5.642) 6(-6.4,-5.642) 7(-5.6,-5.642) 8(-4.8,-5.642) 9(-4,-5.642) 10(-3.2,-5.642) 11(-2.4,-5.642) 12(-1.6,-5.642) 13(-0.8,-5.642) 14(0,-5.642) 15(0.8,-5.642) 16(1.6,-5.642) 17(2.4,-5.642) 18(3.2,-5.642) 19(4,-5.642) 20(4.8,-5.642) 21(5.6,-5.642) 22(6.4,-5.642) 23(7.2,-5.642) 24(8,-5.642) 25(8.8,-5.642) 26(9.6,-5.642) 27(10.4,-5.642) 28(10.4,5.642) 29(9.6,5.642) 30(8.8,5.642) 31(8,5.642) 32(7.2,5.642) 33(6.4,5.642) 34(5.6,5.642) 35(4.8,5.642) 36(4,5.642) 37(3.2,5.642) 38(2.4,5.642) 39(1.6,5.642) 40(0.8,5.642) 41(0,5.642) 42(-0.8,5.642) 43(-1.6,5.642) 44(-2.4,5.642) 45(-3.2,5.642) 46(-4,5.642) 47(-4.8,5.642) 48(-5.6,5.642) 49(-6.4,5.642) 50(-7.2,5.642) 51(-8,5.642) 52(-8.8,5.642) 53(-9.6,5.642) 54(-10.4,5.642)
  silkscreen extent -11.23,-5.79 11.19,4.65
USB-C-SMD_TYPE-C16PIN [mm]
  oval 1x2.1 hole 0.6 slot 1.7 at 90 deg: 1(-4.32,1.787) 2(4.32,1.787)
  oval 1x1.8 hole 0.6 slot 1.4 at 90 deg: 3(-4.32,-2.362) 4(4.32,-2.362)
  rect 0.6x1.15 smd paste-100 mask+0.051: A1B12(-3.2,2.362) A4B9(-2.4,2.362) B1A12(3.2,2.362) B4A9(2.4,2.362)
  rect 0.3x1.15 smd paste-100 mask+0.051: A5(-1.25,2.362) A6(-0.25,2.362) A7(0.25,2.362) A8(1.25,2.362) B5(1.75,2.362) B6(0.75,2.362) B7(-0.75,2.362) B8(-1.75,2.362)
  Board Outline Layer board cut-out: 2.89,1.613 2.955,1.613 3.074,1.564 3.166,1.472 3.215,1.353 3.215,1.223 3.166,1.104 3.074,1.013 2.955,0.963 2.89,0.963 2.825,0.963 2.706,1.013 2.614,1.104 2.565,1.223 2.565,1.353 2.614,1.472 2.706,1.564 2.825,1.613 2.89,1.613
  Board Outline Layer board cut-out: -2.89,1.613 -2.825,1.613 -2.706,1.564 -2.614,1.472 -2.565,1.353 -2.565,1.223 -2.614,1.104 -2.706,1.013 -2.825,0.963 -2.89,0.963 -2.955,0.963 -3.074,1.013 -3.166,1.104 -3.215,1.223 -3.215,1.353 -3.166,1.472 -3.074,1.564 -2.955,1.613 -2.89,1.613
  Board Outline Layer circle w0.005: c2.89,1.288 r0.325
  Board Outline Layer circle w0.005: c-2.89,1.288 r0.325
  Board Outline Layer region: 2.89,1.613 2.955,1.613 3.074,1.564 3.166,1.472 3.215,1.353 3.215,1.223 3.166,1.104 3.074,1.013 2.955,0.963 2.89,0.963 2.825,0.963 2.706,1.013 2.614,1.104 2.565,1.223 2.565,1.353 2.614,1.472 2.706,1.564 2.825,1.613 2.89,1.613
  Board Outline Layer region: -2.89,1.613 -2.825,1.613 -2.706,1.564 -2.614,1.472 -2.565,1.353 -2.565,1.223 -2.614,1.104 -2.706,1.013 -2.825,0.963 -2.89,0.963 -2.955,0.963 -3.074,1.013 -3.166,1.104 -3.215,1.223 -3.215,1.353 -3.166,1.472 -3.074,1.564 -2.955,1.613 -2.89,1.613
  silkscreen extent -4.45,-5 4.45,0.52
WIRELM-SMD_ESP32-S3-WROOM-1 [mm]
  rect 1.5x0.9 smd paste+0 mask+0.05: 1(-8.75,8.895) 2(-8.75,7.625) 3(-8.75,6.355) 4(-8.75,5.085) 5(-8.75,3.815) 6(-8.75,2.545) 7(-8.75,1.275) 8(-8.75,0.005) 9(-8.75,-1.265) 10(-8.75,-2.535) 11(-8.75,-3.805) 12(-8.75,-5.075) 13(-8.75,-6.345) 14(-8.75,-7.615) 27(8.75,-7.615) 28(8.75,-6.345) 29(8.75,-5.075) 30(8.75,-3.805) 31(8.75,-2.535) 32(8.75,-1.265) 33(8.75,0.005) 34(8.75,1.275) 35(8.75,2.545) 36(8.75,3.815) 37(8.75,5.085) 38(8.75,6.355) 39(8.75,7.625) 40(8.75,8.895)
  rect 0.9x1.5 smd paste+0 mask+0.05: 15(-6.985,-8.895) 16(-5.715,-8.895) 17(-4.445,-8.895) 18(-3.175,-8.895) 19(-1.905,-8.895) 20(-0.635,-8.895) 21(0.635,-8.895) 22(1.905,-8.895) 23(3.175,-8.895) 24(4.445,-8.895) 25(5.715,-8.895) 26(6.985,-8.865)
  rect 0.9x0.9 smd: 41(-2.9,-0.225) 41(-2.9,1.175) 41(-2.9,2.575) 41(-1.5,2.575) 41(-1.5,-0.225) 41(-1.5,1.175) 41(-0.1,2.575) 41(-0.1,1.175) 41(-0.1,-0.225)
  silkscreen extent -9,-9.14 9.02,16.39

## Free pads (board coordinates)
  round 60 hole 36: 1(3740,4080) 1(4170,4990)
  round 3.16 smd: 55(3574.8,4982.69) 55(3615,4970) 55(3648.8,6155.84) 55(3650,3780) 55(3650,4955) 55(3729.25,3640.75) 55(3730,3605) 55(3830,5605) 55(4739.75,4053.61) 55(4798.05,4133.54) 55(5476.62,3982.7) 55(5531.74,3981.16)
  round 3.16 smd far side: 55(3965,4985) 55(4225,5344.16) 55(4270,5345) 55(4275,5810) 55(4295,5375)

## Via types
v1: diameter 15.75, hole 11.81, Top Layer to Bottom Layer, 309 vias
v2: diameter 39.37, hole 19.68, Top Layer to Bottom Layer, 6 vias

## Nets (pads, with @x,y where several pads share a name; then routed paths per layer and width w, separated by ;. In a path a pad name is that pad's centre, name@x,y a point inside that pad or via, vN(x,y) a via of type N, cw(c..) or ccw(c..) an arc to the next point about the centre after c; other vN are vias at no path point)
$1N8318: C15.2 U5.43 | length 56.7
  Top Layer w10: C15.2@5037.68,6240 5047.01,6230.67 U5.43@5047.01,6187.13
$1N8986: C16.2 U5.49 | length 57.7
  Top Layer w10: C16.2@4845.43,6239.57 4858.03,6226.97 U5.49@4858.03,6187.13
$1N9039: C14.1 U5.27 | length 29.1
  Top Layer w10: U5.27@5519.45,5742.87 5522.32,5740 C14.1@5547.32,5740
$1N9091: C13.1 U5.14 | length 57.9
  Top Layer w10: C13.1@5110,5685 U5.14@5110,5742.87
$1N9142: C12.1 U5.9 | length 55.1
  Top Layer w10: 4935,5695 4952.52,5712.52 U5.9@4952.52,5742.87
$1N9192: C11.1 U5.3 | length 55.3
  Top Layer w10: C11.1@4757.68,5690 4763.54,5695.86 U5.3@4763.54,5742.87
$1N9241: C10.1 U5.1 | length 57.9
  Top Layer w10: C10.1@4700.55,5690 U5.1@4700.55,5747.87
$1N9341: C8.1 C10.2 C11.2 C12.2 C13.2 C14.2 C15.1 C16.1 R1.2 | length 2608
  Top Layer w10: C10.2@4717.68,5690 4730,5677.68 v1(4730,5670.83) 4742.32,5683.15 C11.2@4742.32,5690 ; v1(4816.19,6271.19) 4834.57,6252.81 C16.1@4834.57,6250.43 ; v1(4905,5665) C12.2@4919.57,5679.57 ; v1(5003.43,6256.57) 5005.75,6256.57 C15.1@5022.32,6240 ; v1(5085,5605) 5090,5600 5175,5600 5215,5640 v1(5220,5640) ; v1(5110,5645) C13.2@5110,5667.32 ; v1(5145,6310) 5202.04,6310 R1.2@5205,6307.04 ; C14.2@5562.68,5740 v1(5562.68,5760) ; C8.1@5600,5999.37 5629.37,5970 v1(5660,5970)
  Bottom Layer w10: v1(4730,5670.83) 4735.83,5665 v1(4905,5665) 5025,5665 v1(5085,5605) 5085,5620 v1(5110,5645) ; v1(4816.19,6271.19) 4988.81,6271.19 v1(5003.43,6256.57) 5091.57,6256.57 v1(5145,6310) 5562.68,5892.32 v1(5562.68,5760) ; v1(5220,5640) 5442.68,5640 v1(5562.68,5760) ; v1(5660,5970) 5660,5857.32 v1(5562.68,5760)
$1N9437: R1.1 U5.37 | length 98.7
  Top Layer w10: R1.1@5205,6272.96 5235.98,6241.98 U5.37@5235.98,6187.13
$1N11348: R2.1 U5.38 | length 758.3
  Top Layer w3.94: R2.1@4542.04,6010 5065,6010 5205,6150 5205,6186.62 U5.38@5204.49,6187.13
$1N11975: R7.1 U2.3 | length 58.6
  Top Layer w10: U2.3@3679.8,4220.51 3680,4220.31 R7.1@3680,4162.04
$1N12553: R10.2 USB1.B5 | length 68.1
  Top Layer w10: USB1.B5@3508.01,3721.1 3556.44,3721.1 R10.2@3570.34,3735
$1N12557: R9.2 USB1.A5 | length 77.8
  Top Layer w10: USB1.A5@3508.01,3839.21 3548.87,3839.21 R9.2@3575,3865.34
$1N14416: C18.2 L1.1 U6.5 | length 300.8
  Top Layer w10: L1.1@3726.89,3790 3726.89,3875 3710,3891.89 3710,3996.32 3721.12,4007.44 3729.76,4007.44 C18.2@3730,4007.68 3789.53,4007.68 U6.5@3791.85,4010
$1N14459: C18.1 U6.6 | length 70
  Top Layer w10: C18.1@3730,3992.32 3749.72,3972.6 U6.6@3791.85,3972.6
$1N14567: C19.1 R11.1 R12.2 U6.1 | length 456.7
  Top Layer w10: U6.1@3898.15,3972.6 4054.96,3972.6 C19.1@4100,3927.56 4217.9,3927.56 R11.1@4220,3929.66 4334.32,3929.66 R12.2@4335,3930.34
$1N16832: C24.2 L2.1 U7.5 | length 208.4
  Top Layer w10: C24.2@5060,4057.32 5027.68,4025 U7.5@5008.15,4025 5008.37,4024.78 L2.1@5151.25,4024.78
$1N16833: C24.1 U7.6 | length 56.1
  Top Layer w10: U7.6@5008.15,4062.4 5018.19,4072.44 5059.76,4072.44 C24.1@5060,4072.68
$1N16834: C25.1 R14.2 R15.1 U7.1 | length 1210.5
  Top Layer w10: U7.1@4901.85,4062.4 4913.45,4062.4 4955,4020.85 4955,3991.75 5281.75,3665 5560,3665 5594.18,3699.18 R14.2@5594.18,3846.88 5554.18,3846.88 R15.1@5533.84,3826.54 5531.74,3824.44 C25.1@5531.74,3721.54
$1N17349: C29.2 C30.2 C31.1 C32.1 | length 149
  Top Layer w10: C30.2@4832.68,4270 4875,4227.68 C32.1@4875,4176.46 4839.14,4176.46 C29.2@4837.68,4175
$1N29790: R26.2 U2.5 | length 2277.7
  Top Layer w3.94: v1(3289.68,5800) 3300,5810.31 R26.2@3300,5832.96 ; U2.5@3779.8,4220.51 3780,4220.31 v1(3780,4180)
  Bottom Layer w3.94: v1(3289.68,5800) 3285,5795.31 3285,5783.01 3279.93,5777.94 3279.93,5767.26 3285,5762.19 3285,5751.51 3279.93,5746.44 3279.93,5735.76 3285,5730.7 3285,5720.02 3279.93,5714.95 3279.93,5704.27 3285,5699.2 3285,5688.52 3279.93,5683.45 3279.93,5672.77 3285,5667.7 3285,5657.02 3279.93,5651.96 3279.93,5641.28 3285,5636.21 3285,5625.53 3279.93,5620.46 3279.93,5609.78 3285,5604.71 3285,4145 3295,4135 3679.96,4135 3724.96,4180 v1(3780,4180)
$1N29833: R27.2 U2.6 | length 2330.5
  Top Layer w3.94: v1(3316.42,5798.58) 3316.42,5804.38 R27.2@3345,5832.96 ; v1(3829.8,4180) U2.6@3829.8,4220.51
  Bottom Layer w3.94: v1(3316.42,5798.58) 3305,5787.17 3305,5776.5 3302.22,5773.71 3296.81,5773.71 3294.03,5770.93 3294.03,5760.75 3296.81,5757.96 3302.22,5757.96 3305,5755.18 3305,5745 3302.22,5742.22 3296.81,5742.22 3294.03,5739.43 3294.03,5729.25 3296.81,5726.47 3302.22,5726.47 3305,5723.68 3305,5713.5 3302.22,5710.72 3296.81,5710.72 3294.03,5707.94 3294.03,5697.76 3296.81,5694.97 3302.22,5694.97 3305,5692.19 3305,5682.01 3302.22,5679.22 3296.81,5679.22 3294.03,5676.44 3294.03,5666.26 3296.81,5663.48 3302.22,5663.48 3305,5660.69 3305,5650.51 3302.22,5647.73 3296.81,5647.73 3294.03,5644.94 3294.03,5634.76 3296.81,5631.98 3302.22,5631.98 3305,5629.2 3305,5619.02 3302.22,5616.23 3296.81,5616.23 3294.03,5613.45 3294.03,5603.27 3296.81,5600.48 3302.22,5600.48 3305,5597.7 3305,5587.52 3302.22,5584.74 3296.81,5584.74 3294.03,5581.95 3294.03,5571.77 3296.81,5568.99 3302.22,5568.99 3305,5566.2 3305,5557.45 3302.22,5554.66 3296.81,5554.66 3294.03,5551.88 3294.03,5541.7 3296.81,5538.91 3302.22,5538.91 3305,5536.13 3305,5525.95 3302.22,5523.17 3296.81,5523.17 3294.03,5520.38 3294.03,5510.2 3296.81,5507.42 3302.22,5507.42 3305,5504.63 3305,5494.45 3302.22,5491.67 3296.81,5491.67 3294.03,5488.89 3294.03,5478.71 3296.81,5475.92 3302.22,5475.92 3305,5473.14 3305,4280 3375,4210 3799.8,4210 v1(3829.8,4180)
$1N29916: R29.2 U2.9 | length 2325.6
  Top Layer w3.94: v1(3368.05,5791.95) 3382,5791.95 3423.01,5832.96 R29.2@3435,5832.96 ; v1(3925,4290) 3979.8,4235.19 U2.9@3979.8,4220.51
  Bottom Layer w3.94: v1(3368.05,5791.95) 3360.1,5784 3357.86,5784 3347.13,5773.26 3347.13,5761.59 3349.91,5758.8 3357.22,5758.8 3360,5756.02 3360,5745.84 3357.22,5743.06 3349.91,5743.06 3347.13,5740.27 3347.13,5730.09 3349.91,5727.31 3357.22,5727.31 3360,5724.52 3360,5714.34 3357.22,5711.56 3349.91,5711.56 3347.13,5708.78 3347.13,5698.6 3349.91,5695.81 3357.22,5695.81 3360,5693.03 3360,5682.85 3357.22,5680.06 3349.91,5680.06 3347.13,5677.28 3347.13,5667.1 3349.91,5664.32 3357.22,5664.32 3360,5661.53 3360,5651.35 3357.22,5648.57 3349.91,5648.57 3347.13,5645.78 3347.13,5635.6 3349.91,5632.82 3357.22,5632.82 3360,5630.04 3360,5619.86 3357.22,5617.07 3349.91,5617.07 3347.13,5614.29 3347.13,5605.89 3349.91,5603.1 3357.22,5603.1 3360,5600.32 3360,5590.14 3357.22,5587.35 3349.91,5587.35 3347.13,5584.57 3347.13,5574.39 3349.91,5571.61 3357.22,5571.61 3360,5568.82 3360,5558.64 3357.22,5555.86 3349.91,5555.86 3347.13,5553.07 3347.13,4417.87 3475,4290 v1(3925,4290)
$1N29959: R30.2 U2.12 | length 2344.4
  Top Layer w3.94: v1(3405,5790) 3437.04,5790 R30.2@3480,5832.96 ; v1(3820,4350) 4090,4350 4129.81,4310.19 U2.12@4129.81,4220.51
  Bottom Layer w3.94: v1(3405,5790) 3388.48,5790 3374.61,5776.12 3374.61,5775.74 3372.87,5774.01 3372.87,4477.13 3500,4350 v1(3820,4350)
$1N30002: R31.2 U2.23 | length 2320.7
  Top Layer w3.94: v1(3420,4730) 4200,4730 4240,4690 U2.23@4275.19,4690 ; v1@3455,5790 3482.04,5790 R31.2@3525,5832.96
  Bottom Layer w3.94: v1(3420,4730) 3396.52,4753.48 3396.52,5357.32 3393.73,5360.11 3384.68,5360.11 3381.9,5362.89 3381.9,5373.07 3384.68,5375.85 3393.73,5375.85 3396.52,5378.64 3396.52,5388.82 3393.73,5391.6 3384.68,5391.6 3381.9,5394.39 3381.9,5404.57 3384.68,5407.35 3393.73,5407.35 3396.52,5410.13 3396.52,5420.31 3393.73,5423.1 3384.68,5423.1 3381.9,5425.88 3381.9,5436.06 3384.68,5438.85 3393.73,5438.85 3396.52,5441.63 3396.52,5451.81 3393.73,5454.59 3384.68,5454.59 3381.9,5457.38 3381.9,5467.56 3384.68,5470.34 3393.73,5470.34 3396.52,5473.13 3396.52,5483.31 3393.73,5486.09 3384.68,5486.09 3381.9,5488.87 3381.9,5499.05 3384.68,5501.84 3393.73,5501.84 3396.52,5504.62 3396.52,5514.8 3393.73,5517.59 3384.68,5517.59 3381.9,5520.37 3381.9,5530.55 3384.68,5533.33 3393.73,5533.33 3396.52,5536.12 3396.52,5546.3 3393.73,5549.08 3384.68,5549.08 3381.9,5551.87 3381.9,5562.05 3384.68,5564.83 3393.73,5564.83 3396.52,5567.61 3396.52,5577.79 3393.73,5580.58 3384.68,5580.58 3381.9,5583.36 3381.9,5593.54 3384.68,5596.33 3393.73,5596.33 3396.52,5599.11 3396.52,5609.29 3393.73,5612.07 3384.68,5612.07 3381.9,5614.86 3381.9,5625.04 3384.68,5627.82 3393.73,5627.82 3396.52,5630.61 3396.52,5640.79 3393.73,5643.57 3384.68,5643.57 3381.9,5646.35 3381.9,5656.53 3384.68,5659.32 3393.73,5659.32 3396.52,5662.1 3396.52,5693.48 3380.75,5709.25 3380.75,5759.75 3391.74,5770.75 3425.17,5770.75 3442.21,5787.79 v1(3457.21,5787.79)
$1N30085: R34.2 U2.25 | length 2337.5
  Top Layer w3.94: v1@3540,5780 3567.04,5780 3615,5827.96 R34.2@3615,5832.96 ; v1(3560,4795) 3565,4790 3596.82,4790 3599.6,4792.78 3599.6,4802.22 3602.39,4805 3612.57,4805 3615.35,4802.22 3615.35,4792.78 3618.14,4790 3628.32,4790 3631.1,4792.78 3631.1,4802.22 3633.88,4805 3644.06,4805 3646.85,4802.22 3646.85,4792.78 3649.63,4790 3659.81,4790 3662.6,4792.78 3662.6,4802.22 3665.38,4805 3675.56,4805 3678.34,4802.22 3678.34,4792.78 3681.13,4790 3691.31,4790 3694.09,4792.78 3694.09,4802.22 3696.88,4805 3707.06,4805 3709.84,4802.22 3709.84,4792.78 3712.62,4790 3722.8,4790 3725.59,4792.78 3725.59,4802.22 3728.37,4805 3738.55,4805 3741.34,4802.22 3741.34,4792.78 3744.12,4790 U2.25@4275.19,4790
  Bottom Layer w3.94: v1(3539.71,5780.29) 3460,5700.58 3460,5687.95 3462.78,5685.17 3477.22,5685.17 3480,5682.39 3480,5672.21 3477.22,5669.42 3462.78,5669.42 3460,5666.64 3460,5656.46 3462.78,5653.67 3476.81,5653.67 3479.59,5650.89 3479.59,5640.71 3476.81,5637.93 3462.78,5637.93 3460,5635.14 3460,5624.96 3462.78,5622.18 3477.16,5622.18 3479.95,5619.39 3479.95,5609.21 3477.16,5606.43 3462.78,5606.43 3460,5603.65 3460,5593.47 3462.78,5590.68 3476.81,5590.68 3479.59,5587.9 3479.59,5577.72 3476.81,5574.93 3462.78,5574.93 3460,5572.15 3460,5561.97 3462.78,5559.19 3478.57,5559.19 3481.36,5556.4 3481.36,5546.22 3478.57,5543.44 3462.78,5543.44 3460,5540.65 3460,5530.47 3462.78,5527.69 3479.63,5527.69 3482.42,5524.91 3482.42,5514.73 3479.63,5511.94 3462.78,5511.94 3460,5509.16 3460,5498.98 3462.78,5496.19 3481.4,5496.19 3484.18,5493.41 3484.18,5483.23 3481.4,5480.45 3462.78,5480.45 3460,5477.66 3460,5469.23 3462.78,5466.45 3481.66,5466.45 3484.44,5463.67 3484.44,5453.49 3481.66,5450.7 3462.78,5450.7 3460,5447.92 3460,5437.74 3462.78,5434.96 3481.66,5434.96 3484.44,5432.17 3484.44,5421.99 3481.66,5419.21 3462.78,5419.21 3447.87,5404.3 3447.87,4907.13 v1(3560,4795)
$1N30089: R32.2 U2.24 | length 2348
  Top Layer w3.94: v1(3500,5785) 3522.04,5785 R32.2@3570,5832.96 ; v1(3550,4770) 4195,4770 4225,4740 U2.24@4275.19,4740
  Bottom Layer w3.94: v1(3500,5785) 3477.87,5762.87 3438.46,5762.87 3415,5739.41 3415,5671.23 3417.78,5668.45 3437.22,5668.45 3440,5665.67 3440,5655.49 3437.22,5652.7 3417.78,5652.7 3415,5649.92 3415,5639.74 3417.78,5636.95 3437.22,5636.95 3440,5634.17 3440,5623.99 3437.22,5621.21 3417.78,5621.21 3415,5618.42 3415,5608.24 3417.78,5605.46 3437.22,5605.46 3440,5602.67 3440,5592.49 3437.22,5589.71 3417.78,5589.71 3415,5586.93 3415,5576.75 3417.78,5573.96 3437.22,5573.96 3440,5571.18 3440,5561 3437.22,5558.21 3417.78,5558.21 3415,5555.43 3415,5545.25 3417.78,5542.47 3437.22,5542.47 3440,5539.68 3440,5529.5 3437.22,5526.72 3417.78,5526.72 3415,5523.93 3415,5513.75 3417.78,5510.97 3437.22,5510.97 3440,5508.19 3440,5498.01 3437.22,5495.22 3417.78,5495.22 3415,5492.44 3415,5482.26 3417.78,5479.47 3437.22,5479.47 3440,5476.69 3440,5466.51 3437.22,5463.73 3417.78,5463.73 3415,5460.94 3415,5450.76 3417.78,5447.98 3437.22,5447.98 3440,5445.19 3440,5435.01 3437.22,5432.23 3417.78,5432.23 3415,5429.45 3415,5419.27 3417.78,5416.48 3437.22,5416.48 3440,5413.7 3440,5403.52 3437.22,5400.73 3417.78,5400.73 3415,5397.95 3415,4905 v1(3550,4770)
$1N30093: R28.2 U2.7 | length 2326.6
  Top Layer w3.94: v1(3341.32,5795) 3343.72,5795 3381.68,5832.96 R28.2@3390,5832.96 ; U2.7@3879.8,4220.51 v1(3879.8,4260)
  Bottom Layer w3.94: v1(3341.32,5795) 3315,5768.68 3315,5759.08 3317.78,5756.29 3322.22,5756.29 3325,5753.51 3325,5743.33 3322.22,5740.54 3317.78,5740.54 3315,5737.76 3315,5727.58 3317.78,5724.8 3322.22,5724.8 3325,5722.01 3325,5711.83 3322.22,5709.05 3317.78,5709.05 3315,5706.26 3315,5696.08 3317.78,5693.3 3322.22,5693.3 3325,5690.52 3325,5680.34 3322.22,5677.55 3317.78,5677.55 3315,5674.77 3315,5664.59 3317.78,5661.8 3322.22,5661.8 3325,5659.02 3325,5648.84 3322.22,5646.06 3317.78,5646.06 3315,5643.27 3315,5633.09 3317.78,5630.31 3322.22,5630.31 3325,5627.52 3325,5617.34 3322.22,5614.56 3317.78,5614.56 3315,5611.78 3315,5601.6 3317.78,5598.81 3322.22,5598.81 3325,5596.03 3325,5585.85 3322.22,5583.06 3317.78,5583.06 3315,5580.28 3315,5570.1 3317.78,5567.32 3322.22,5567.32 3325,5564.53 3325,5554.35 3322.22,5551.57 3317.78,5551.57 3315,5548.78 3315,5538.93 3317.78,5536.14 3327.22,5536.14 3330,5533.36 3330,5523.18 3327.22,5520.4 3317.78,5520.4 3315,5517.61 3315,5507.43 3317.78,5504.65 3327.22,5504.65 3330,5501.86 3330,5491.68 3327.22,5488.9 3317.78,5488.9 3315,5486.12 3315,4310 3365,4260 v1(3879.8,4260)
$1N33205: P1.8 R35.1 | length 74.2
  Top Layer w3.94: R35.1@4550,6817.04 4551.6,6818.64 P1.8@4551.6,6890.56
$1N60668: C64.1 U11.6 | length 55.4
  Top Layer w3.94: U11.6@4340.24,3736.3 4367.72,3763.78 4367.72,3764.75 4372.38,3769.41 4373.34,3769.41 4376.62,3772.68 C64.1@4380,3772.68
$1N60669: C64.2 L3.1 U11.5 | length 140.8
  Top Layer w3.94: U11.5@4340.24,3698.9 L3.1@4406.22,3698.9 ; C64.2@4380,3757.32 4380,3725.12 L3.1@4406.22,3698.9 ; L3.1@4410.12,3695 L3.1@4406.22,3698.9
$1N60670: C65.1 R40.2 R41.1 U11.1 | length 301
  Top Layer w3.94: U11.1@4233.94,3736.3 4251.57,3718.66 4258.88,3718.66 4263.54,3714 4263.54,3706.69 4295.34,3674.89 R40.2@4295.34,3465
$1N63749: R43.1 USB2.A5 | length 239.9
  Top Layer w3.94: R43.1@3849.66,3525 3854.66,3520 v1(3885,3520) ; v1(4025.79,3565) USB2.A5@4025.79,3608.01
  Bottom Layer w3.94: v1(3885,3520) 3980.79,3520 v1(4025.79,3565)
$1N63772: R42.1 USB2.B5 | length 412.4
  Top Layer w3.94: R42.1@3849.66,3465 3880,3465 v1(3885,3470) ; USB2.B5@4143.9,3608.01 4145,3606.91 v1(4145,3570)
  Bottom Layer w3.94: v1(3885,3470) 3915,3500 4135,3500 4136.1,3501.1 4136.1,3561.1 v1(4145,3570)
$1N63825: R44.2 USB2.A4B9 USB2.B4A9 | length 483.7
  Top Layer w3.94: USB2.A4B9@3980.51,3608.01 3990,3598.52 v1(3990,3560) 4007.3,3542.7 4157.7,3542.7 4168.03,3553.03 4168.03,3606.55 USB2.B4A9@4169.49,3608.01 ; v1(4025,3690) 4059.66,3690 R44.2@4065,3695.34
  Bottom Layer w3.94: v1(3990,3560) 3990,3655 v1(4025,3690)
$1N64401: C69.2 L4.1 U12.5 | length 143.3
  Top Layer w3.94: C69.2@4912.68,3660 4940.12,3632.56 L4.1@4940.12,3590
  Top Layer w19.68: U12.5@4878.15,3590 L4.1@4940.12,3590
$1N64402: C69.1 U12.6 | length 40.5
  Top Layer w3.94: U12.6@4878.15,3627.4 4897.32,3646.57 C69.1@4897.32,3660
$1N64403: C70.1 R46.2 R47.1 U12.1 | length 418.8
  Top Layer w3.94: R46.2@4709.66,3425 4767.44,3425 C70.1@4772.44,3430 ; U12.1@4771.85,3627.4 4774.25,3625 4781.56,3625 4801.46,3605.11 4801.46,3537.49 4772.44,3508.48 C70.1@4772.44,3430 ; R47.1@4887.96,3400 4802.44,3400 C70.1@4772.44,3430
$2N5507: R23.2 U1.P10 | length 789
  Top Layer w3.94: R23.2@3532.04,5925 3635,5925 3639.17,5920.83 3639.17,5913.44 3663.44,5889.17 3750.83,5889.17 v1(3765,5875)
  Top Layer w10: U1.P10@4242.24,5836.77 4255,5849.53 v1@4255,5850
  Bottom Layer w10: v1(3765,5875) 3779.09,5889.09 4174.73,5889.09 4209.04,5854.78 4236.89,5854.78 4240.83,5850.83 v1(4255.83,5850.83)
$2N5509: R24.2 U1.N10 | length 939.3
  Top Layer w3.94: v1(3675,5873.35) 3744.27,5873.35 3758.44,5859.17 3771.56,5859.17 3785.73,5873.35 3793.35,5873.35 3842.33,5922.33 3842.33,5922.53 3867.35,5947.56 3898.58,5947.56 3931.34,5914.8 3998.69,5914.8 4006.73,5906.76 4006.73,5893.53 4015.54,5884.72 4090.99,5884.72 4091.27,5885 4109.75,5885 4110.03,5884.72 4122.49,5884.72 4131.3,5893.53 4131.3,5907.65 4138.45,5914.8 4185.48,5914.8 4195.71,5904.57 4195.71,5862.04 4204.52,5853.23 4227.2,5853.23 U1.N10@4242.24,5868.27
  Top Layer w10: R24.2@3617.04,6025 3652.04,5990 v1(3685,5990)
  Bottom Layer w3.94: v1(3675,5873.35) 3665,5883.35 3665,5907.94 3692.87,5935.81 3692.87,5952.51 3690,5955.39 3690,5965 3685,5970 v1(3685,5990)
$2N5511: R25.2 U1.R10 | length 312.4
  Top Layer w3.94: R25.2@4060,5587.04 v1(4060,5620) ; v1(4195,5790) 4226.96,5790 U1.R10@4242.24,5805.28
  Bottom Layer w3.94: v1(4060,5620) 4189.17,5749.17 4189.17,5756.56 4195,5762.38 v1(4195,5790)
+1V1: C25.2 C27.2 C28.2 C41.1 C42.1 C43.1 C44.1 C49.1 C53.1 C54.1 C61.1 L2.2 pad.55@5476.62,3982.7 R15.2 U1.G6 U1.G7 U1.L8 U1.L9 U1.L10 | length 4641.6
  Top Layer w3.94: v1@4100,6075 4100,6073.5 U1.G6@4116.26,6057.24 U1.G7@4147.76,6057.24 ; U1.L8@4179.25,5931.26 U1.L9@4210.75,5931.26 4213.36,5931.26 v1(4228.8,5915.82) 4242.24,5929.26 U1.L10@4242.24,5931.26
  Top Layer w19.68: C25.2@5476.62,3721.54 C28.2@5476.62,3931.54 pad.55@5476.62,3982.7 C27.2@5476.62,4026.54
  Top Layer w39.37: v2(4537.47,4885.8) 4538.27,4885 4645,4885 5387.47,4142.53 L2.2@5387.47,4024.78 5389.23,4026.54 C27.2@5476.62,4026.54
  Inner2 w19.68: 3835,5850 3893.03,5908.03 4001.55,5908.03 ; v1(4100.32,6074.68) 4100.32,6072.69 4076.89,6049.26 4064.86,6049.26 4031.67,6016.06 4031.67,5938.15 4001.55,5908.03 ; v1(4133.47,5978.09) 4133.47,5908.47 4130,5905 4004.58,5905 4001.55,5908.03
  Inner2 w39.37: 3835,5850 3690.4,5705.4 3690.4,5334.6 3800,5225 4340,5225 4537.47,5027.53 v2(4537.47,4885.8)
  Bottom Layer w3.94: C61.1@4097.56,6040 4101.64,6044.08 4131.11,6044.08 4141.84,6054.81 4170.19,6054.81 4182.28,6042.72 4199.76,6042.72 4211.15,6054.17 4231.56,6054.17 4252.68,6075.3 4252.68,6085 ; C53.1@4217.68,5925 4225,5925 4227.68,5922.32 C49.1@4227.68,5960 ; C43.1@4252.68,6095 4252.68,6085 ; C44.1@4292.68,6045 4292.68,6049.35 4257.03,6085 4252.68,6085
  Bottom Layer w7.87: C61.1@4092.56,6040 4092.56,6019.01 v1(4133.47,5978.09) 4138.5,5978.09 4142.2,5974.39 4142.2,5974.25 4146.38,5970.08 4146.38,5953.69 C54.1@4142.68,5950 4142.68,5932.32 4155,5920 4184.82,5920 4194.82,5910 4228.27,5910 v1@4228.8,5910.53
+1V8: C29.1 C32.2 C35.1 C62.1 C63.1 P1.11 pad.55@4798.05,4133.54 R38.2 R39.2 U1.F10 U1.F11 U8.2 | length 4898.6
  Top Layer w3.94: v1(4259.26,6136.58) 4259.26,6127.03 4258.7,6126.47 4258.7,6114.01 4259.26,6113.45 4259.26,6105.76 U1.F10@4242.24,6088.74 U1.F11@4273.74,6088.74 ; R38.2@4415,6772.96 4415,6754.71 4414.86,6754.57 4414.86,6715.14 4420,6710 4450.79,6710 4513.75,6772.96 4526.99,6772.96 ; R39.2@4470,6777.96 4521.99,6777.96 4526.99,6772.96 ; P1.11@4610.65,6890.56 4614.51,6886.7 4614.51,6843.44 4615,6842.95 C35.1@4615,6822.68 ; 4619.35,6822.68 4627.28,6814.75 4627.28,6799.89 4610.83,6783.44 4610.83,6776.4 4598.29,6763.87 4536.08,6763.87 4526.99,6772.96
  Top Layer w10: C29.1@4822.32,4175 4740.89,4175 4782.35,4133.54 pad.55@4798.05,4133.54 C32.2@4875,4133.54
  Top Layer w11.81: v2(4590,6985) 4610.65,6964.35 P1.11@4610.65,6890.56
  Top Layer w39.37: v2(4655,4425) 4655,4200 4678.86,4176.14 U8.2@4739.75,4176.14
  Inner2 w19.68: v1(4165.38,6104.49) 4166.86,6104.49 4198.96,6136.58 v1(4259.26,6136.58) 4266.3,6143.62 4266.3,6144.82 4300.23,6178.75 4483.75,6178.75
  Inner2 w39.37: v2(4590,6985) 4551.46,7023.54 4397.09,7023.54 4345,6971.46 4345,6530 4545,6330 4545,6240 4483.75,6178.75 4990,5672.5 4990,4760 v2(4655,4425)
  Bottom Layer w3.94: C63.1@4145,6107.32 4162.55,6107.32 v1(4165.38,6104.49) 4150,6089.11 C62.1@4150,6087.68
+2V5: C65.2 C67.2 C68.2 L3.2 R41.2 U1.G11 U1.L7 | length 3397.5
  Top Layer w3.94: U1.L7@4147.76,5931.26 4157.98,5931.26 4174.44,5947.72 4248.47,5947.72 4257.28,5956.53 4257.28,5968.99 4256.12,5970.15 v1(4256.12,5978.51) ; v1(4256.12,6041.49) 4271.86,6057.24 U1.G11@4273.74,6057.24
  Top Layer w19.68: R41.2@4327.04,3520 4342.56,3535.52 C65.2@4342.56,3580
  Top Layer w39.37: C65.2@4342.56,3580 4434.88,3580 L3.2@4549.88,3695 ; v2(4549.88,3805) L3.2@4549.88,3695 ; C67.2@4685,3612.56 C68.2@4615,3612.56 4615,3629.88 L3.2@4549.88,3695
  Inner2 w19.68: v1(4256.12,5978.51) v1(4256.12,6041.49)
  Inner2 w27.56: v1(4256.12,6041.49) 4259.62,6045 4375,6045
  Inner2 w39.37: 4375,6045 4549.88,5870.12
  Inner2 w59.06: v2(4549.88,3805) 4549.88,4723.78 4700,4873.9 4700,5368.26 4549.88,5518.38 4549.88,5870.12
+2V8: C34.1 C70.2 C72.2 C73.2 C74.1 L4.2 P1.4 P1.24 R47.2 | length 5491.4
  Top Layer w3.94: C34.1@4445,6822.68 4472.85,6850.53 P1.4@4472.85,6890.56 ; P1.24@4866.62,6890.44 4870,6887.06 C74.1@4870,6842.68
  Top Layer w11.81: P1.4@4472.85,6890.56 4472.85,6952.56 4581.12,7060.83 4758.23,7060.83 4866.62,6952.43 P1.24@4866.62,6890.44
  Top Layer w19.68: C70.2@4827.56,3430 4919.88,3430 ; R47.2@4922.04,3400 4922.04,3427.84 4919.88,3430 ; C73.2@5207.44,3585 5202.44,3590 L4.2@5079.88,3590 4919.88,3430 ; C72.2@5212.44,3470 C73.2@5212.44,3580
  Top Layer w39.37: L4.2@5080,3590.12 v2(5080,3720)
  Inner2 w39.37: v2(4670,7060) 5095,7060 5415,6740 5415,5560 5200,5345 5200,3890 5080,3770 v2(5080,3720)
+3V3: C8.2 C17.2 C19.2 C22.2 C23.2 C37.1 C39.1 C40.1 C45.1 C46.1 C47.1 C48.1 C50.1 C51.1 C52.1 C55.1 C56.1 C57.1 C58.1 C59.1 CARD1.4 H1.5 L1.2 pad.55@3648.8,6155.84 R3.1 R4.1 R5.2 R7.2 R11.2 R16.2 R17.2 R18.2 R19.2 R20.2 R21.2 R22.2 R23.1 U1.F6 U1.F7 U1.G9 U1.H6 U1.H7 U1.H11 U1.J6 U1.J7 U1.J11 U1.K11 U1.L6 U1.L11 U2.2 U9.1 U9.4 | length 3220.1
  Top Layer w3.94: v1(3465.07,5915.42) 3474.65,5925 R23.1@3497.96,5925 ; pad.55@3648.8,6155.84 v1(3667.96,6175) 3695.18,6175 3695.26,6175.08 ; v1(3690,6260) R18.2@3730.34,6260 ; v1(3695,6021.65) 3698.35,6025 R17.2@3730.34,6025 ; v1@3730.34,6310 R19.2@3730.34,6365 ; v1(4067.14,5947.01) 4068.31,5945.84 4068.31,5926.44 4079.75,5915 4100,5915 U1.L6@4116.26,5931.26 ; v1@4070,5980 4077.74,5980 4078.53,5979.21 4101.22,5979.21 U1.J6@4116.26,5994.25 4129.17,6007.16 v1(4129.17,6009.97) 4129.17,6012.84 U1.H6@4116.26,6025.75 ; U1.F6@4116.26,6088.74 4126.81,6099.29 v1(4126.81,6101.25) 4135.25,6101.25 U1.F7@4147.76,6088.74 ; U1.J7@4147.76,5994.25 4160,5982.01 v1@4160,5980 ; U1.H7@4147.76,6025.75 4149.63,6025.75 v1(4162.86,6038.98) ; U1.G9@4210.75,6057.24 4223.51,6070 v1(4225,6070) ; U1.K11@4273.74,5962.76 4273.74,5957.76 4270,5954.02 4270,5950 4273.74,5946.26 U1.L11@4273.74,5931.26 v1(4290,5915) ; U1.J11@4273.74,5994.25 4289.49,6010 v1(4290,6010) 4274.25,6025.75 U1.H11@4273.74,6025.75
  Top Layer w10: CARD1.4@3616.07,6722.01 3616.07,6254.27 3695.26,6175.08 R20.2@3730.34,6140 ; U2.2@3629.8,4220.51 3625,4215.7 v1(3625,4105) 3657.04,4105 R7.2@3680,4127.96 3860.92,4127.96 R5.2@3892.96,4160 ; v1(3655,5720) 3707.24,5720 ; R16.2@3730.18,5917.97 3733.16,5915 v1(3755,5915) ; U9.1@3741.69,5685.55 3707.24,5720 ; U9.4@3741.69,5754.45 3707.24,5720 ; L1.2@3963.11,3790 4017.56,3790 C19.2@4100,3872.44 4217.9,3872.44 R11.2@4220,3870.34 4222.1,3872.44 v1(4335.57,3872.44) C23.2@4445,3872.44 C22.2@4565,3872.44 ; R21.2@4030,4107.96 R22.2@4080,4107.96 4055,4082.96 v1(4055,4065) ; R3.1@4377.04,4640 4380,4642.96 v1(4380,4675) ; v1(4380,4315) R4.1@4380,4352.96 ; v1(5600,5860) C8.2@5600,5920.63
  Bottom Layer w3.94: C51.1@4042.68,5945 4065.13,5945 v1(4067.14,5947.01) ; C56.1@4052.68,5980 4069.39,5980 v1(4069.69,5979.69) ; C37.1@4097.68,6155 4100,6152.68 v1(4100,6137.35) ; C45.1@4145,6037.68 4161.56,6037.68 v1(4162.86,6038.98) 4169.55,6032.28 4194.75,6032.28 4199.41,6027.62 4199.41,6023.27 C46.1@4202.68,6020 4217.32,6020 C47.1@4227.32,6010 ; v1(4160,5981.62) 4163.94,5981.62 C57.1@4177.32,5995 ; C50.1@4192.68,6135 4232.03,6135 4239.41,6142.38 4239.41,6146.73 C39.1@4242.68,6150 4242.68,6154.35 4234.75,6162.28 4229.82,6162.28 v1(4193.13,6198.98) ; C52.1@4280,5977.68 C55.1@4312.32,6010 v1(4290,6010) ; v1(4290,5915) 4297.72,5907.28 4299.75,5907.28 4307.68,5899.35 C48.1@4307.68,5895 ; C40.1@4302.68,6075 4320.85,6075 v1(4322.81,6073.04) 4339.4,6073.04 C59.1@4355,6057.44 ; v1(4321.95,6136.89) 4357.56,6172.5 C58.1@4357.56,6180
  other v1: 3685,5905.55 3729.02,6308.68
+5V: C20.2 C26.2 C30.1 C31.2 C33.2 C66.2 C71.2 pad.55@3729.25,3640.75 U6.2 U6.3 U7.2 U7.3 U8.3 U11.2 U11.3 U12.2 U12.3 USB1.A4B9 USB1.B4A9 | length 3939.8
  Top Layer w3.94: U12.3@4771.85,3552.6 U12.2@4771.85,3590 4754.21,3607.64 4746.9,3607.64 4742.24,3612.29 4742.24,3619.61 4712.56,3649.29 C71.2@4712.56,3700 4901.85,3889.29 U7.3@4901.85,3987.6
  Top Layer w10: USB1.A4B9@3508.01,3884.49 3484.49,3884.49 3420,3820 3420,3765.03 3480.82,3704.21 3499.31,3704.21 USB1.B4A9@3508.01,3695.51 3560.37,3695.51 ; C33.2@3575.63,3620 3575.63,3680.25 3560.37,3695.51 ; C20.2@3777.44,3615 3755,3615 pad.55@3729.25,3640.75 3712.44,3657.56 ; U6.3@3898.15,4047.4 U6.2@3898.15,4010 ; U11.2@4233.94,3698.9 U11.3@4233.94,3661.5 4173.94,3661.5 4170,3657.56 3712.44,3657.56 ; U8.3@4739.75,4266.69 4751.69,4266.69 U8.3@4755,4270 ; C30.1@4817.32,4270 U8.3@4755,4270 ; U7.2@4901.85,4025 U7.3@4901.85,3987.6 4896.89,3992.56 C26.2@4815,3992.56 ; 3560.37,3695.51 3674.49,3695.51 ; 3674.49,3695.51 3765.51,3695.51 3835,3765 3835,3960 3885,4010 U6.2@3898.15,4010 ; 3674.49,3695.51 3712.44,3657.56 ; U6.2@3898.15,4010 3904.67,4016.52 4791.04,4016.52 C26.2@4815,3992.56 ; U8.3@4755,4270 4810,4325 4860,4325 4916.46,4268.54 C31.2@4916.46,4230 4916.46,4126.01 4815,4024.55 C26.2@4815,3992.56